# EAGLE board SparkX_EZ_Header-Panel (EAGLE 9.6.2), part 1 of 6
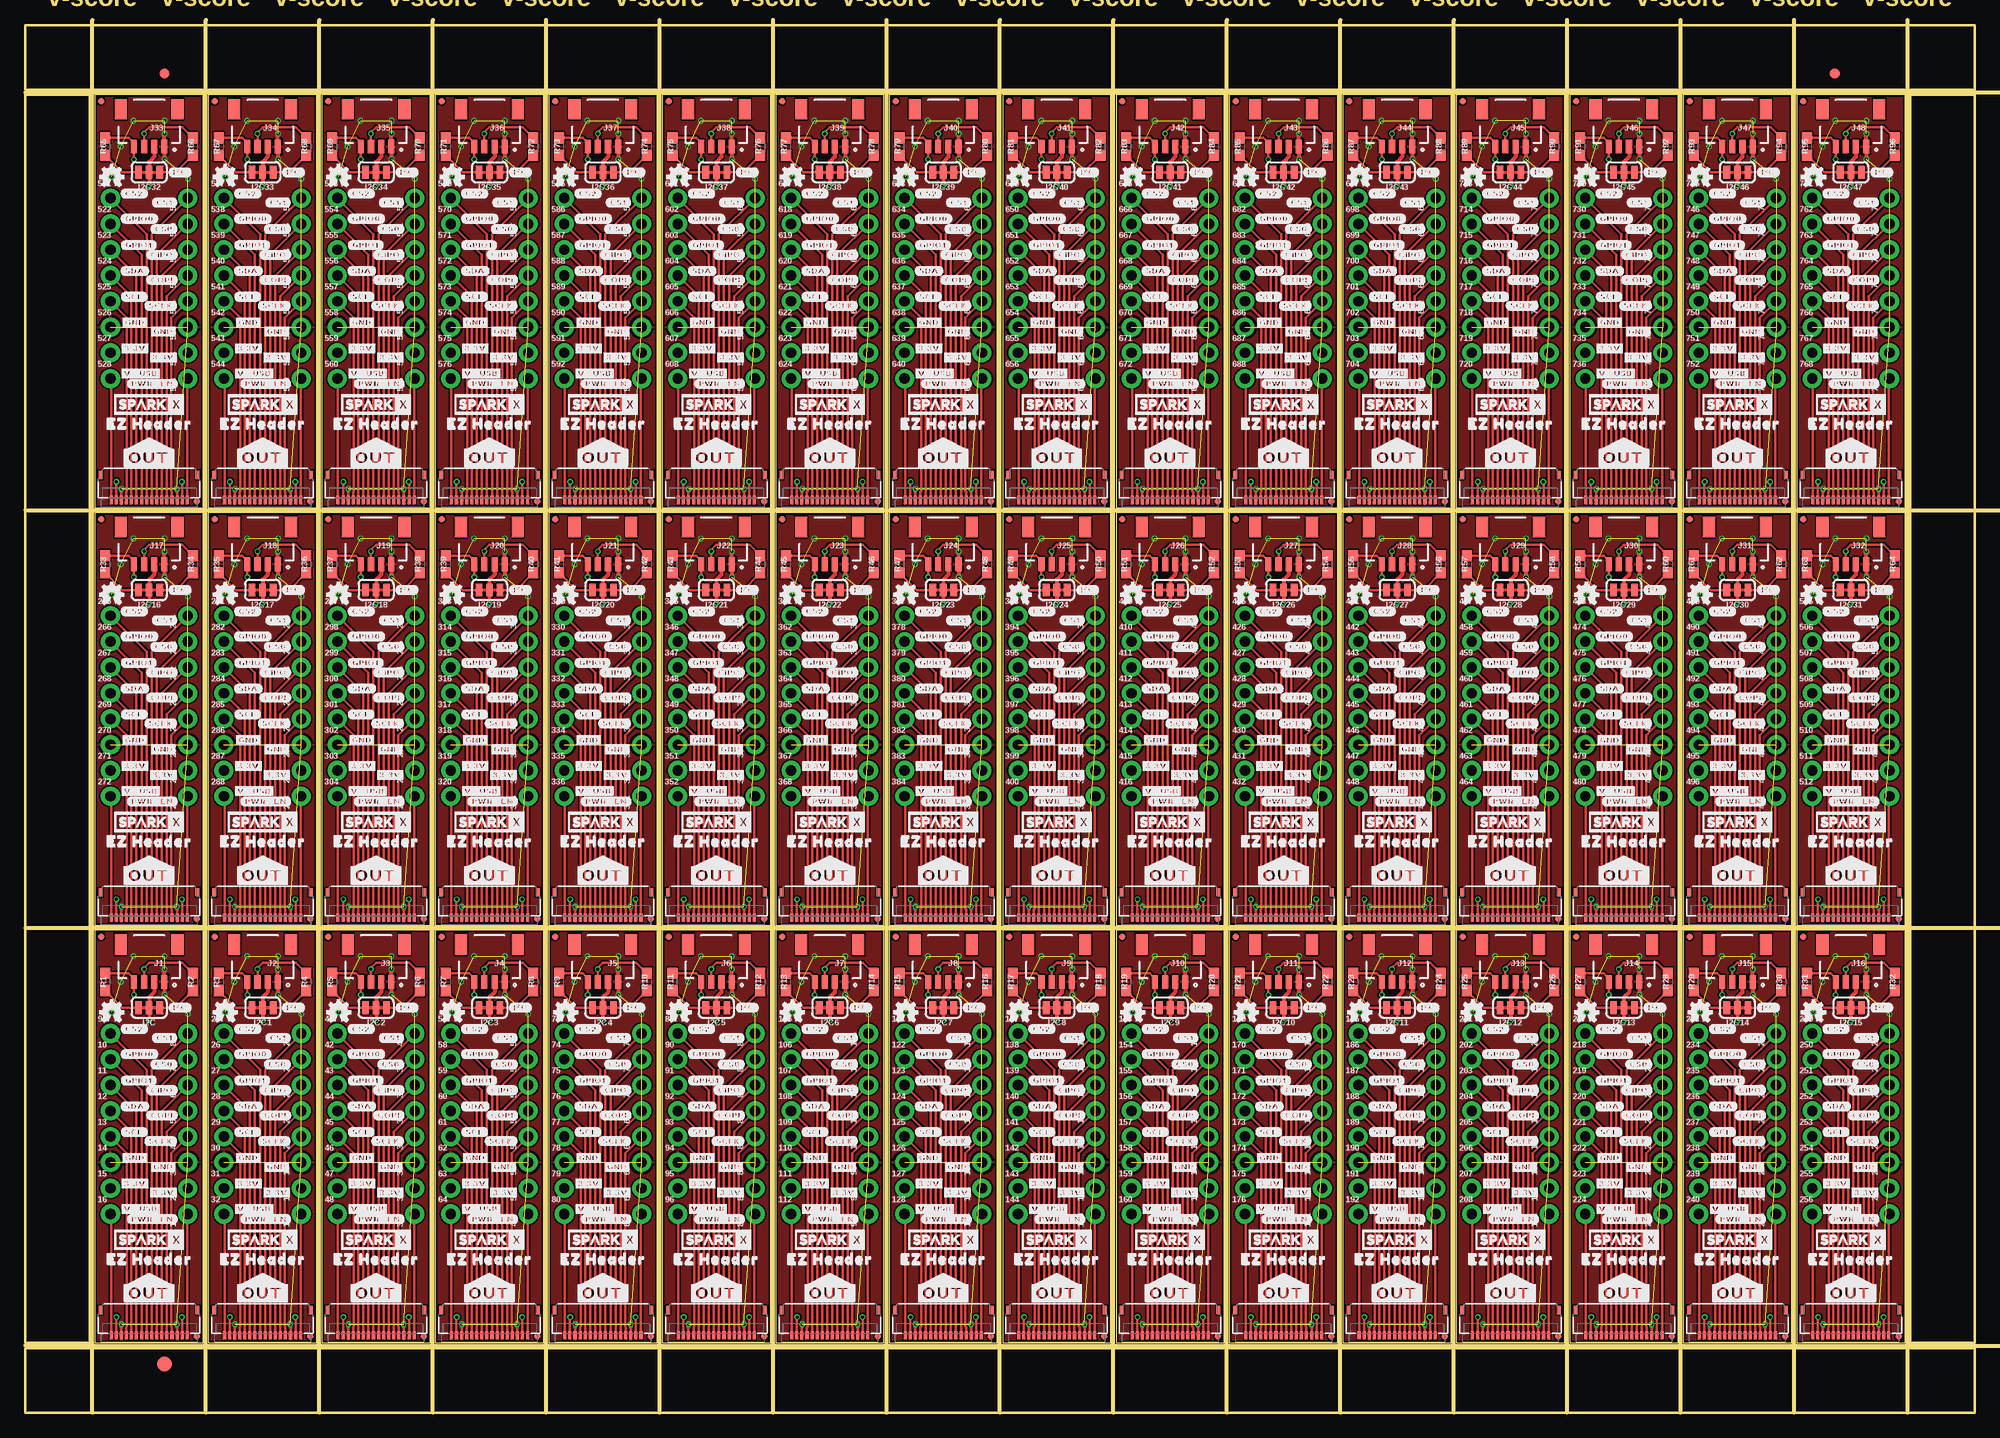
[diagram p0: board, top side]
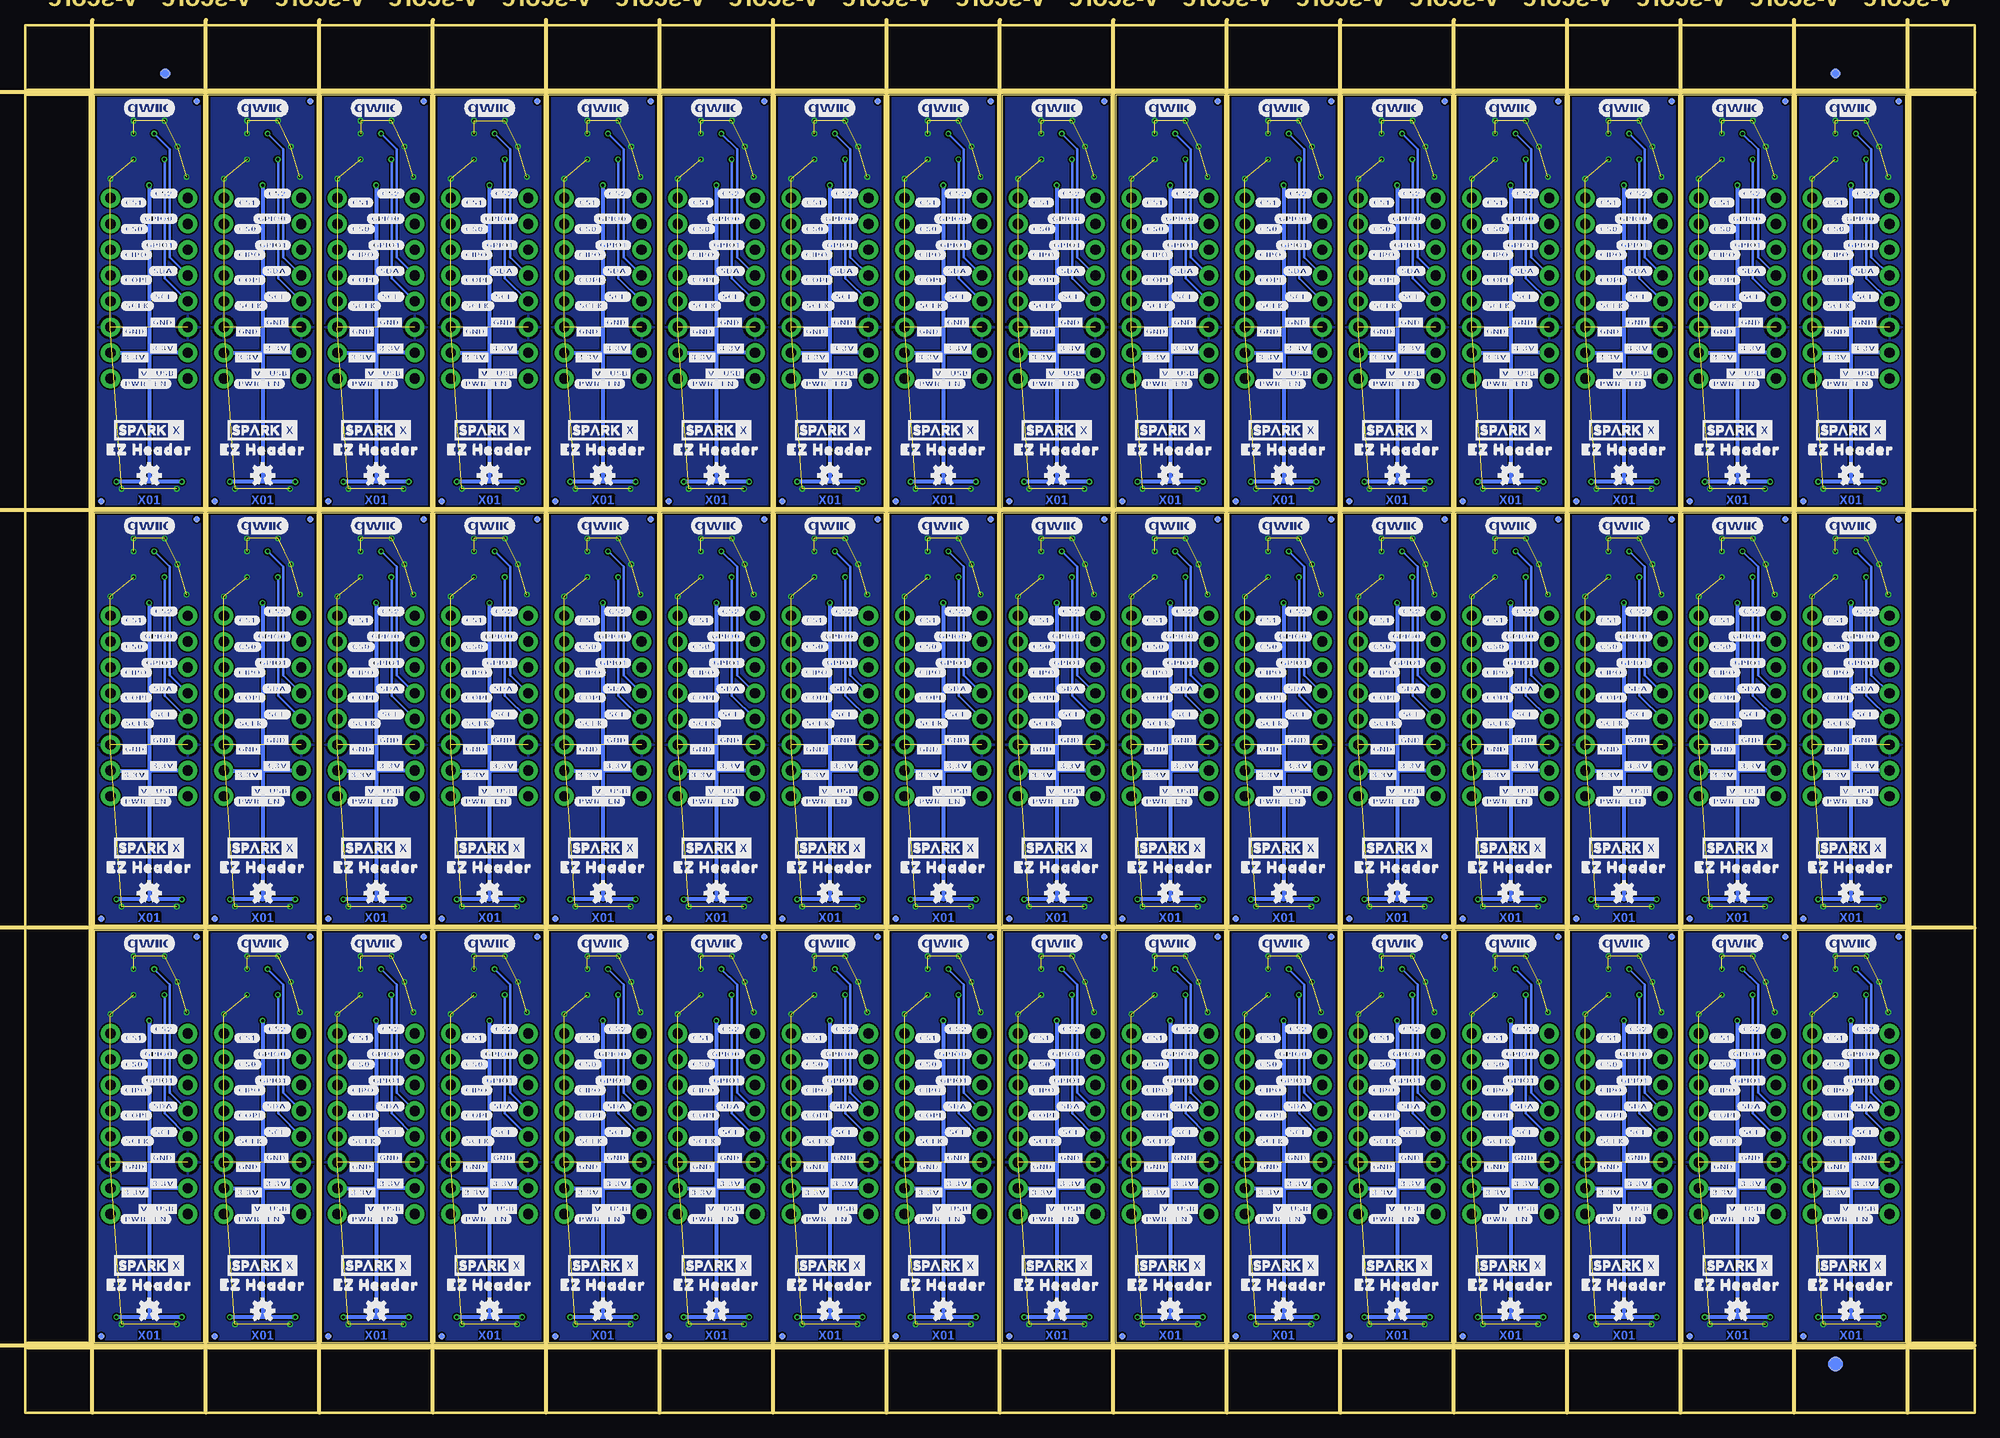
[diagram p1: board, bottom side, seen from below]

Size 192.02 x 136.65 mm. Coordinates in mm from the lower left corner, seen from the top.
Outline: 208 segments
Copper layers (1*16): Top 0.035mm / dielectric 1.5mm / Bottom 0.035mm
Design rules "SparkX_EZ_Header": minimum track width 5mil, minimum drill 0.3mm, track to track 5mil, track to pad 5mil, pad to pad 5mil, via to via 5mil, smd to smd 5mil, copper to edge 7mil, drill to drill 7mil, minimum pad ring 5mil, minimum via ring 5mil, stop-mask expansion 2.5mil, vias tented up to drill 25mil, thermal gap 10mil
Milling: 21 lines

## Footprints (pad centres in the part's own frame; a part is rotated, then mirrored left to right if it is on the bottom)
1X01_NO_SILK = drill 1.016 pad 1.88: 1 0,0
FIDUCIAL-1X2 = smd 1 x 1: 1 0,0
FIDUCIAL-1.5X3 = smd 1.5 x 1.5: 1 0,0
FIDUCIAL-MICRO = smd 0.635 x 0.635: 1 0,0
SMT-JUMPER_3_2-NC_TRACE_SILK = smd 0.66 x 1.27: 1 -1.041,0; 2 0,0; 3 1.041,0
JST04_1MM_RA = smd 0.6 x 1.35: 1 -1.5,0; 2 -0.5,0; 3 0.5,0; 4 1.5,0 | smd 1.2 x 2: NC1 2.8,-3.675; NC2 -2.8,-3.675
FPC_16_DOUBLESIDED_BACKFLIP = smd 0.3 x 0.8: 1 -3.75,1.35; 2 -3.25,1.35; 3 -2.75,1.35; 4 -2.25,1.35; 5 -1.75,1.35; 6 -1.25,1.35; 7 -0.75,1.35; 8 -0.25,1.35; 9 0.25,1.35; 10 0.75,1.35; 11 1.25,1.35; 12 1.75,1.35; 13 2.25,1.35; 14 2.75,1.35; 15 3.25,1.35; 16 3.75,1.35 | smd 0.4 x 0.8: MP1 -4.75,-1.15; MP2 4.75,-1.15
0603 = smd 1.1 x 1: 1 -0.85,0; 2 0.85,0

## Placement (x,y rotation side)
1  [1X01_NO_SILK]  16,19.56 90 top
2  [1X01_NO_SILK]  16,22.1 90 top
3  [1X01_NO_SILK]  16,24.64 90 top
4  [1X01_NO_SILK]  16,27.18 90 top
5  [1X01_NO_SILK]  16,29.72 90 top
6  [1X01_NO_SILK]  16,32.26 90 top
7  [1X01_NO_SILK]  16,34.8 90 top
8  [1X01_NO_SILK]  16,37.34 90 top
9  [1X01_NO_SILK]  8.38,37.34 0 top
10  [1X01_NO_SILK]  8.38,34.8 0 top
11  [1X01_NO_SILK]  8.38,32.26 0 top
12  [1X01_NO_SILK]  8.38,29.72 0 top
13  [1X01_NO_SILK]  8.38,27.18 0 top
14  [1X01_NO_SILK]  8.38,24.64 0 top
15  [1X01_NO_SILK]  8.38,22.1 0 top
16  [1X01_NO_SILK]  8.38,19.56 0 top
17  [1X01_NO_SILK]  27.18,19.56 90 top
18  [1X01_NO_SILK]  27.18,22.1 90 top
19  [1X01_NO_SILK]  27.18,24.64 90 top
20  [1X01_NO_SILK]  27.18,27.18 90 top
21  [1X01_NO_SILK]  27.18,29.72 90 top
22  [1X01_NO_SILK]  27.18,32.26 90 top
23  [1X01_NO_SILK]  27.18,34.8 90 top
24  [1X01_NO_SILK]  27.18,37.34 90 top
25  [1X01_NO_SILK]  19.56,37.34 0 top
26  [1X01_NO_SILK]  19.56,34.8 0 top
27  [1X01_NO_SILK]  19.56,32.26 0 top
28  [1X01_NO_SILK]  19.56,29.72 0 top
29  [1X01_NO_SILK]  19.56,27.18 0 top
30  [1X01_NO_SILK]  19.56,24.64 0 top
31  [1X01_NO_SILK]  19.56,22.1 0 top
32  [1X01_NO_SILK]  19.56,19.56 0 top
33  [1X01_NO_SILK]  38.35,19.56 90 top
34  [1X01_NO_SILK]  38.35,22.1 90 top
35  [1X01_NO_SILK]  38.35,24.64 90 top
36  [1X01_NO_SILK]  38.35,27.18 90 top
37  [1X01_NO_SILK]  38.35,29.72 90 top
38  [1X01_NO_SILK]  38.35,32.26 90 top
39  [1X01_NO_SILK]  38.35,34.8 90 top
40  [1X01_NO_SILK]  38.35,37.34 90 top
41  [1X01_NO_SILK]  30.73,37.34 0 top
42  [1X01_NO_SILK]  30.73,34.8 0 top
43  [1X01_NO_SILK]  30.73,32.26 0 top
44  [1X01_NO_SILK]  30.73,29.72 0 top
45  [1X01_NO_SILK]  30.73,27.18 0 top
46  [1X01_NO_SILK]  30.73,24.64 0 top
47  [1X01_NO_SILK]  30.73,22.1 0 top
48  [1X01_NO_SILK]  30.73,19.56 0 top
49  [1X01_NO_SILK]  49.53,19.56 90 top
50  [1X01_NO_SILK]  49.53,22.1 90 top
51  [1X01_NO_SILK]  49.53,24.64 90 top
52  [1X01_NO_SILK]  49.53,27.18 90 top
53  [1X01_NO_SILK]  49.53,29.72 90 top
54  [1X01_NO_SILK]  49.53,32.26 90 top
55  [1X01_NO_SILK]  49.53,34.8 90 top
56  [1X01_NO_SILK]  49.53,37.34 90 top
57  [1X01_NO_SILK]  41.91,37.34 0 top
58  [1X01_NO_SILK]  41.91,34.8 0 top
59  [1X01_NO_SILK]  41.91,32.26 0 top
60  [1X01_NO_SILK]  41.91,29.72 0 top
61  [1X01_NO_SILK]  41.91,27.18 0 top
62  [1X01_NO_SILK]  41.91,24.64 0 top
63  [1X01_NO_SILK]  41.91,22.1 0 top
64  [1X01_NO_SILK]  41.91,19.56 0 top
65  [1X01_NO_SILK]  60.71,19.56 90 top
66  [1X01_NO_SILK]  60.71,22.1 90 top
67  [1X01_NO_SILK]  60.71,24.64 90 top
68  [1X01_NO_SILK]  60.71,27.18 90 top
69  [1X01_NO_SILK]  60.71,29.72 90 top
70  [1X01_NO_SILK]  60.71,32.26 90 top
71  [1X01_NO_SILK]  60.71,34.8 90 top
72  [1X01_NO_SILK]  60.71,37.34 90 top
73  [1X01_NO_SILK]  53.09,37.34 0 top
74  [1X01_NO_SILK]  53.09,34.8 0 top
75  [1X01_NO_SILK]  53.09,32.26 0 top
76  [1X01_NO_SILK]  53.09,29.72 0 top
77  [1X01_NO_SILK]  53.09,27.18 0 top
78  [1X01_NO_SILK]  53.09,24.64 0 top
79  [1X01_NO_SILK]  53.09,22.1 0 top
80  [1X01_NO_SILK]  53.09,19.56 0 top
81  [1X01_NO_SILK]  71.88,19.56 90 top
82  [1X01_NO_SILK]  71.88,22.1 90 top
83  [1X01_NO_SILK]  71.88,24.64 90 top
84  [1X01_NO_SILK]  71.88,27.18 90 top
85  [1X01_NO_SILK]  71.88,29.72 90 top
86  [1X01_NO_SILK]  71.88,32.26 90 top
87  [1X01_NO_SILK]  71.88,34.8 90 top
88  [1X01_NO_SILK]  71.88,37.34 90 top
89  [1X01_NO_SILK]  64.26,37.34 0 top
90  [1X01_NO_SILK]  64.26,34.8 0 top
91  [1X01_NO_SILK]  64.26,32.26 0 top
92  [1X01_NO_SILK]  64.26,29.72 0 top
93  [1X01_NO_SILK]  64.26,27.18 0 top
94  [1X01_NO_SILK]  64.26,24.64 0 top
95  [1X01_NO_SILK]  64.26,22.1 0 top
96  [1X01_NO_SILK]  64.26,19.56 0 top
97  [1X01_NO_SILK]  83.06,19.56 90 top
98  [1X01_NO_SILK]  83.06,22.1 90 top
99  [1X01_NO_SILK]  83.06,24.64 90 top
100  [1X01_NO_SILK]  83.06,27.18 90 top
101  [1X01_NO_SILK]  83.06,29.72 90 top
102  [1X01_NO_SILK]  83.06,32.26 90 top
103  [1X01_NO_SILK]  83.06,34.8 90 top
104  [1X01_NO_SILK]  83.06,37.34 90 top
105  [1X01_NO_SILK]  75.44,37.34 0 top
106  [1X01_NO_SILK]  75.44,34.8 0 top
107  [1X01_NO_SILK]  75.44,32.26 0 top
108  [1X01_NO_SILK]  75.44,29.72 0 top
109  [1X01_NO_SILK]  75.44,27.18 0 top
110  [1X01_NO_SILK]  75.44,24.64 0 top
111  [1X01_NO_SILK]  75.44,22.1 0 top
112  [1X01_NO_SILK]  75.44,19.56 0 top
113  [1X01_NO_SILK]  94.23,19.56 90 top
114  [1X01_NO_SILK]  94.23,22.1 90 top
115  [1X01_NO_SILK]  94.23,24.64 90 top
116  [1X01_NO_SILK]  94.23,27.18 90 top
117  [1X01_NO_SILK]  94.23,29.72 90 top
118  [1X01_NO_SILK]  94.23,32.26 90 top
119  [1X01_NO_SILK]  94.23,34.8 90 top
120  [1X01_NO_SILK]  94.23,37.34 90 top
121  [1X01_NO_SILK]  86.61,37.34 0 top
122  [1X01_NO_SILK]  86.61,34.8 0 top
123  [1X01_NO_SILK]  86.61,32.26 0 top
124  [1X01_NO_SILK]  86.61,29.72 0 top
125  [1X01_NO_SILK]  86.61,27.18 0 top
126  [1X01_NO_SILK]  86.61,24.64 0 top
127  [1X01_NO_SILK]  86.61,22.1 0 top
128  [1X01_NO_SILK]  86.61,19.56 0 top
129  [1X01_NO_SILK]  105.41,19.56 90 top
130  [1X01_NO_SILK]  105.41,22.1 90 top
131  [1X01_NO_SILK]  105.41,24.64 90 top
132  [1X01_NO_SILK]  105.41,27.18 90 top
133  [1X01_NO_SILK]  105.41,29.72 90 top
134  [1X01_NO_SILK]  105.41,32.26 90 top
135  [1X01_NO_SILK]  105.41,34.8 90 top
136  [1X01_NO_SILK]  105.41,37.34 90 top
137  [1X01_NO_SILK]  97.79,37.34 0 top
138  [1X01_NO_SILK]  97.79,34.8 0 top
139  [1X01_NO_SILK]  97.79,32.26 0 top
140  [1X01_NO_SILK]  97.79,29.72 0 top
141  [1X01_NO_SILK]  97.79,27.18 0 top
142  [1X01_NO_SILK]  97.79,24.64 0 top
143  [1X01_NO_SILK]  97.79,22.1 0 top
144  [1X01_NO_SILK]  97.79,19.56 0 top
145  [1X01_NO_SILK]  116.59,19.56 90 top
146  [1X01_NO_SILK]  116.59,22.1 90 top
147  [1X01_NO_SILK]  116.59,24.64 90 top
148  [1X01_NO_SILK]  116.59,27.18 90 top
149  [1X01_NO_SILK]  116.59,29.72 90 top
150  [1X01_NO_SILK]  116.59,32.26 90 top
151  [1X01_NO_SILK]  116.59,34.8 90 top
152  [1X01_NO_SILK]  116.59,37.34 90 top
153  [1X01_NO_SILK]  108.97,37.34 0 top
154  [1X01_NO_SILK]  108.97,34.8 0 top
155  [1X01_NO_SILK]  108.97,32.26 0 top
156  [1X01_NO_SILK]  108.97,29.72 0 top
157  [1X01_NO_SILK]  108.97,27.18 0 top
158  [1X01_NO_SILK]  108.97,24.64 0 top
159  [1X01_NO_SILK]  108.97,22.1 0 top
160  [1X01_NO_SILK]  108.97,19.56 0 top
161  [1X01_NO_SILK]  127.76,19.56 90 top
162  [1X01_NO_SILK]  127.76,22.1 90 top
163  [1X01_NO_SILK]  127.76,24.64 90 top
164  [1X01_NO_SILK]  127.76,27.18 90 top
165  [1X01_NO_SILK]  127.76,29.72 90 top
166  [1X01_NO_SILK]  127.76,32.26 90 top
167  [1X01_NO_SILK]  127.76,34.8 90 top
168  [1X01_NO_SILK]  127.76,37.34 90 top
169  [1X01_NO_SILK]  120.14,37.34 0 top
170  [1X01_NO_SILK]  120.14,34.8 0 top
171  [1X01_NO_SILK]  120.14,32.26 0 top
172  [1X01_NO_SILK]  120.14,29.72 0 top
173  [1X01_NO_SILK]  120.14,27.18 0 top
174  [1X01_NO_SILK]  120.14,24.64 0 top
175  [1X01_NO_SILK]  120.14,22.1 0 top
176  [1X01_NO_SILK]  120.14,19.56 0 top
177  [1X01_NO_SILK]  138.94,19.56 90 top
178  [1X01_NO_SILK]  138.94,22.1 90 top
179  [1X01_NO_SILK]  138.94,24.64 90 top
180  [1X01_NO_SILK]  138.94,27.18 90 top
181  [1X01_NO_SILK]  138.94,29.72 90 top
182  [1X01_NO_SILK]  138.94,32.26 90 top
183  [1X01_NO_SILK]  138.94,34.8 90 top
184  [1X01_NO_SILK]  138.94,37.34 90 top
185  [1X01_NO_SILK]  131.32,37.34 0 top
186  [1X01_NO_SILK]  131.32,34.8 0 top
187  [1X01_NO_SILK]  131.32,32.26 0 top
188  [1X01_NO_SILK]  131.32,29.72 0 top
189  [1X01_NO_SILK]  131.32,27.18 0 top
190  [1X01_NO_SILK]  131.32,24.64 0 top
191  [1X01_NO_SILK]  131.32,22.1 0 top
192  [1X01_NO_SILK]  131.32,19.56 0 top
193  [1X01_NO_SILK]  150.11,19.56 90 top
194  [1X01_NO_SILK]  150.11,22.1 90 top
195  [1X01_NO_SILK]  150.11,24.64 90 top
196  [1X01_NO_SILK]  150.11,27.18 90 top
197  [1X01_NO_SILK]  150.11,29.72 90 top
198  [1X01_NO_SILK]  150.11,32.26 90 top
199  [1X01_NO_SILK]  150.11,34.8 90 top
200  [1X01_NO_SILK]  150.11,37.34 90 top
201  [1X01_NO_SILK]  142.49,37.34 0 top
202  [1X01_NO_SILK]  142.49,34.8 0 top
203  [1X01_NO_SILK]  142.49,32.26 0 top
204  [1X01_NO_SILK]  142.49,29.72 0 top
205  [1X01_NO_SILK]  142.49,27.18 0 top
206  [1X01_NO_SILK]  142.49,24.64 0 top
207  [1X01_NO_SILK]  142.49,22.1 0 top
208  [1X01_NO_SILK]  142.49,19.56 0 top
209  [1X01_NO_SILK]  161.29,19.56 90 top
210  [1X01_NO_SILK]  161.29,22.1 90 top
211  [1X01_NO_SILK]  161.29,24.64 90 top
212  [1X01_NO_SILK]  161.29,27.18 90 top
213  [1X01_NO_SILK]  161.29,29.72 90 top
214  [1X01_NO_SILK]  161.29,32.26 90 top
215  [1X01_NO_SILK]  161.29,34.8 90 top
216  [1X01_NO_SILK]  161.29,37.34 90 top
217  [1X01_NO_SILK]  153.67,37.34 0 top
218  [1X01_NO_SILK]  153.67,34.8 0 top
219  [1X01_NO_SILK]  153.67,32.26 0 top
220  [1X01_NO_SILK]  153.67,29.72 0 top
221  [1X01_NO_SILK]  153.67,27.18 0 top
222  [1X01_NO_SILK]  153.67,24.64 0 top
223  [1X01_NO_SILK]  153.67,22.1 0 top
224  [1X01_NO_SILK]  153.67,19.56 0 top
225  [1X01_NO_SILK]  172.47,19.56 90 top
226  [1X01_NO_SILK]  172.47,22.1 90 top
227  [1X01_NO_SILK]  172.47,24.64 90 top
228  [1X01_NO_SILK]  172.47,27.18 90 top
229  [1X01_NO_SILK]  172.47,29.72 90 top
230  [1X01_NO_SILK]  172.47,32.26 90 top
231  [1X01_NO_SILK]  172.47,34.8 90 top
232  [1X01_NO_SILK]  172.47,37.34 90 top
233  [1X01_NO_SILK]  164.85,37.34 0 top
234  [1X01_NO_SILK]  164.85,34.8 0 top
235  [1X01_NO_SILK]  164.85,32.26 0 top
236  [1X01_NO_SILK]  164.85,29.72 0 top
237  [1X01_NO_SILK]  164.85,27.18 0 top
238  [1X01_NO_SILK]  164.85,24.64 0 top
239  [1X01_NO_SILK]  164.85,22.1 0 top
240  [1X01_NO_SILK]  164.85,19.56 0 top
241  [1X01_NO_SILK]  183.64,19.56 90 top
242  [1X01_NO_SILK]  183.64,22.1 90 top
243  [1X01_NO_SILK]  183.64,24.64 90 top
244  [1X01_NO_SILK]  183.64,27.18 90 top
245  [1X01_NO_SILK]  183.64,29.72 90 top
246  [1X01_NO_SILK]  183.64,32.26 90 top
247  [1X01_NO_SILK]  183.64,34.8 90 top
248  [1X01_NO_SILK]  183.64,37.34 90 top
249  [1X01_NO_SILK]  176.02,37.34 0 top
250  [1X01_NO_SILK]  176.02,34.8 0 top
251  [1X01_NO_SILK]  176.02,32.26 0 top
252  [1X01_NO_SILK]  176.02,29.72 0 top
253  [1X01_NO_SILK]  176.02,27.18 0 top
254  [1X01_NO_SILK]  176.02,24.64 0 top
255  [1X01_NO_SILK]  176.02,22.1 0 top
256  [1X01_NO_SILK]  176.02,19.56 0 top
257  [1X01_NO_SILK]  16,60.71 90 top
258  [1X01_NO_SILK]  16,63.25 90 top
259  [1X01_NO_SILK]  16,65.79 90 top
260  [1X01_NO_SILK]  16,68.33 90 top
261  [1X01_NO_SILK]  16,70.87 90 top
262  [1X01_NO_SILK]  16,73.41 90 top
263  [1X01_NO_SILK]  16,75.95 90 top
264  [1X01_NO_SILK]  16,78.49 90 top
265  [1X01_NO_SILK]  8.38,78.49 0 top
266  [1X01_NO_SILK]  8.38,75.95 0 top
267  [1X01_NO_SILK]  8.38,73.41 0 top
268  [1X01_NO_SILK]  8.38,70.87 0 top
269  [1X01_NO_SILK]  8.38,68.33 0 top
270  [1X01_NO_SILK]  8.38,65.79 0 top
271  [1X01_NO_SILK]  8.38,63.25 0 top
272  [1X01_NO_SILK]  8.38,60.71 0 top
273  [1X01_NO_SILK]  27.18,60.71 90 top
274  [1X01_NO_SILK]  27.18,63.25 90 top
275  [1X01_NO_SILK]  27.18,65.79 90 top
276  [1X01_NO_SILK]  27.18,68.33 90 top
277  [1X01_NO_SILK]  27.18,70.87 90 top
278  [1X01_NO_SILK]  27.18,73.41 90 top
279  [1X01_NO_SILK]  27.18,75.95 90 top
280  [1X01_NO_SILK]  27.18,78.49 90 top
281  [1X01_NO_SILK]  19.56,78.49 0 top
282  [1X01_NO_SILK]  19.56,75.95 0 top
283  [1X01_NO_SILK]  19.56,73.41 0 top
284  [1X01_NO_SILK]  19.56,70.87 0 top
285  [1X01_NO_SILK]  19.56,68.33 0 top
286  [1X01_NO_SILK]  19.56,65.79 0 top
287  [1X01_NO_SILK]  19.56,63.25 0 top
288  [1X01_NO_SILK]  19.56,60.71 0 top
289  [1X01_NO_SILK]  38.35,60.71 90 top
290  [1X01_NO_SILK]  38.35,63.25 90 top
291  [1X01_NO_SILK]  38.35,65.79 90 top
292  [1X01_NO_SILK]  38.35,68.33 90 top
293  [1X01_NO_SILK]  38.35,70.87 90 top
294  [1X01_NO_SILK]  38.35,73.41 90 top
295  [1X01_NO_SILK]  38.35,75.95 90 top
296  [1X01_NO_SILK]  38.35,78.49 90 top
297  [1X01_NO_SILK]  30.73,78.49 0 top
298  [1X01_NO_SILK]  30.73,75.95 0 top
299  [1X01_NO_SILK]  30.73,73.41 0 top
300  [1X01_NO_SILK]  30.73,70.87 0 top
301  [1X01_NO_SILK]  30.73,68.33 0 top
302  [1X01_NO_SILK]  30.73,65.79 0 top
303  [1X01_NO_SILK]  30.73,63.25 0 top
304  [1X01_NO_SILK]  30.73,60.71 0 top
305  [1X01_NO_SILK]  49.53,60.71 90 top
306  [1X01_NO_SILK]  49.53,63.25 90 top
307  [1X01_NO_SILK]  49.53,65.79 90 top
308  [1X01_NO_SILK]  49.53,68.33 90 top
309  [1X01_NO_SILK]  49.53,70.87 90 top
310  [1X01_NO_SILK]  49.53,73.41 90 top
311  [1X01_NO_SILK]  49.53,75.95 90 top
312  [1X01_NO_SILK]  49.53,78.49 90 top
313  [1X01_NO_SILK]  41.91,78.49 0 top
314  [1X01_NO_SILK]  41.91,75.95 0 top
315  [1X01_NO_SILK]  41.91,73.41 0 top
316  [1X01_NO_SILK]  41.91,70.87 0 top
317  [1X01_NO_SILK]  41.91,68.33 0 top
318  [1X01_NO_SILK]  41.91,65.79 0 top
319  [1X01_NO_SILK]  41.91,63.25 0 top
320  [1X01_NO_SILK]  41.91,60.71 0 top
321  [1X01_NO_SILK]  60.71,60.71 90 top
322  [1X01_NO_SILK]  60.71,63.25 90 top
323  [1X01_NO_SILK]  60.71,65.79 90 top
324  [1X01_NO_SILK]  60.71,68.33 90 top
325  [1X01_NO_SILK]  60.71,70.87 90 top
326  [1X01_NO_SILK]  60.71,73.41 90 top
327  [1X01_NO_SILK]  60.71,75.95 90 top
328  [1X01_NO_SILK]  60.71,78.49 90 top
329  [1X01_NO_SILK]  53.09,78.49 0 top
330  [1X01_NO_SILK]  53.09,75.95 0 top
331  [1X01_NO_SILK]  53.09,73.41 0 top
332  [1X01_NO_SILK]  53.09,70.87 0 top
333  [1X01_NO_SILK]  53.09,68.33 0 top
334  [1X01_NO_SILK]  53.09,65.79 0 top
335  [1X01_NO_SILK]  53.09,63.25 0 top
336  [1X01_NO_SILK]  53.09,60.71 0 top
337  [1X01_NO_SILK]  71.88,60.71 90 top
338  [1X01_NO_SILK]  71.88,63.25 90 top
339  [1X01_NO_SILK]  71.88,65.79 90 top
340  [1X01_NO_SILK]  71.88,68.33 90 top
341  [1X01_NO_SILK]  71.88,70.87 90 top
342  [1X01_NO_SILK]  71.88,73.41 90 top
343  [1X01_NO_SILK]  71.88,75.95 90 top
344  [1X01_NO_SILK]  71.88,78.49 90 top
345  [1X01_NO_SILK]  64.26,78.49 0 top
346  [1X01_NO_SILK]  64.26,75.95 0 top
347  [1X01_NO_SILK]  64.26,73.41 0 top
348  [1X01_NO_SILK]  64.26,70.87 0 top
349  [1X01_NO_SILK]  64.26,68.33 0 top
350  [1X01_NO_SILK]  64.26,65.79 0 top
351  [1X01_NO_SILK]  64.26,63.25 0 top
352  [1X01_NO_SILK]  64.26,60.71 0 top
353  [1X01_NO_SILK]  83.06,60.71 90 top
354  [1X01_NO_SILK]  83.06,63.25 90 top
355  [1X01_NO_SILK]  83.06,65.79 90 top
356  [1X01_NO_SILK]  83.06,68.33 90 top
357  [1X01_NO_SILK]  83.06,70.87 90 top
358  [1X01_NO_SILK]  83.06,73.41 90 top
359  [1X01_NO_SILK]  83.06,75.95 90 top
360  [1X01_NO_SILK]  83.06,78.49 90 top
361  [1X01_NO_SILK]  75.44,78.49 0 top
362  [1X01_NO_SILK]  75.44,75.95 0 top
363  [1X01_NO_SILK]  75.44,73.41 0 top
364  [1X01_NO_SILK]  75.44,70.87 0 top
365  [1X01_NO_SILK]  75.44,68.33 0 top
366  [1X01_NO_SILK]  75.44,65.79 0 top
367  [1X01_NO_SILK]  75.44,63.25 0 top
368  [1X01_NO_SILK]  75.44,60.71 0 top
369  [1X01_NO_SILK]  94.23,60.71 90 top
370  [1X01_NO_SILK]  94.23,63.25 90 top
371  [1X01_NO_SILK]  94.23,65.79 90 top
372  [1X01_NO_SILK]  94.23,68.33 90 top
373  [1X01_NO_SILK]  94.23,70.87 90 top
374  [1X01_NO_SILK]  94.23,73.41 90 top
375  [1X01_NO_SILK]  94.23,75.95 90 top
376  [1X01_NO_SILK]  94.23,78.49 90 top
377  [1X01_NO_SILK]  86.61,78.49 0 top
378  [1X01_NO_SILK]  86.61,75.95 0 top
379  [1X01_NO_SILK]  86.61,73.41 0 top
380  [1X01_NO_SILK]  86.61,70.87 0 top
381  [1X01_NO_SILK]  86.61,68.33 0 top
382  [1X01_NO_SILK]  86.61,65.79 0 top
383  [1X01_NO_SILK]  86.61,63.25 0 top
384  [1X01_NO_SILK]  86.61,60.71 0 top
385  [1X01_NO_SILK]  105.41,60.71 90 top
386  [1X01_NO_SILK]  105.41,63.25 90 top
387  [1X01_NO_SILK]  105.41,65.79 90 top
388  [1X01_NO_SILK]  105.41,68.33 90 top
389  [1X01_NO_SILK]  105.41,70.87 90 top
390  [1X01_NO_SILK]  105.41,73.41 90 top
391  [1X01_NO_SILK]  105.41,75.95 90 top
392  [1X01_NO_SILK]  105.41,78.49 90 top
393  [1X01_NO_SILK]  97.79,78.49 0 top
394  [1X01_NO_SILK]  97.79,75.95 0 top
395  [1X01_NO_SILK]  97.79,73.41 0 top
396  [1X01_NO_SILK]  97.79,70.87 0 top
397  [1X01_NO_SILK]  97.79,68.33 0 top
398  [1X01_NO_SILK]  97.79,65.79 0 top
399  [1X01_NO_SILK]  97.79,63.25 0 top
400  [1X01_NO_SILK]  97.79,60.71 0 top
401  [1X01_NO_SILK]  116.59,60.71 90 top
402  [1X01_NO_SILK]  116.59,63.25 90 top
403  [1X01_NO_SILK]  116.59,65.79 90 top
404  [1X01_NO_SILK]  116.59,68.33 90 top
405  [1X01_NO_SILK]  116.59,70.87 90 top
406  [1X01_NO_SILK]  116.59,73.41 90 top
407  [1X01_NO_SILK]  116.59,75.95 90 top
408  [1X01_NO_SILK]  116.59,78.49 90 top
409  [1X01_NO_SILK]  108.97,78.49 0 top
410  [1X01_NO_SILK]  108.97,75.95 0 top
411  [1X01_NO_SILK]  108.97,73.41 0 top
412  [1X01_NO_SILK]  108.97,70.87 0 top
413  [1X01_NO_SILK]  108.97,68.33 0 top
414  [1X01_NO_SILK]  108.97,65.79 0 top
415  [1X01_NO_SILK]  108.97,63.25 0 top
416  [1X01_NO_SILK]  108.97,60.71 0 top
417  [1X01_NO_SILK]  127.76,60.71 90 top
418  [1X01_NO_SILK]  127.76,63.25 90 top
419  [1X01_NO_SILK]  127.76,65.79 90 top
420  [1X01_NO_SILK]  127.76,68.33 90 top
421  [1X01_NO_SILK]  127.76,70.87 90 top
422  [1X01_NO_SILK]  127.76,73.41 90 top
423  [1X01_NO_SILK]  127.76,75.95 90 top
424  [1X01_NO_SILK]  127.76,78.49 90 top
425  [1X01_NO_SILK]  120.14,78.49 0 top
426  [1X01_NO_SILK]  120.14,75.95 0 top
427  [1X01_NO_SILK]  120.14,73.41 0 top
428  [1X01_NO_SILK]  120.14,70.87 0 top
429  [1X01_NO_SILK]  120.14,68.33 0 top
430  [1X01_NO_SILK]  120.14,65.79 0 top
431  [1X01_NO_SILK]  120.14,63.25 0 top
432  [1X01_NO_SILK]  120.14,60.71 0 top
433  [1X01_NO_SILK]  138.94,60.71 90 top
434  [1X01_NO_SILK]  138.94,63.25 90 top
435  [1X01_NO_SILK]  138.94,65.79 90 top
436  [1X01_NO_SILK]  138.94,68.33 90 top
437  [1X01_NO_SILK]  138.94,70.87 90 top
438  [1X01_NO_SILK]  138.94,73.41 90 top
439  [1X01_NO_SILK]  138.94,75.95 90 top
440  [1X01_NO_SILK]  138.94,78.49 90 top
441  [1X01_NO_SILK]  131.32,78.49 0 top
442  [1X01_NO_SILK]  131.32,75.95 0 top
443  [1X01_NO_SILK]  131.32,73.41 0 top
444  [1X01_NO_SILK]  131.32,70.87 0 top
445  [1X01_NO_SILK]  131.32,68.33 0 top
446  [1X01_NO_SILK]  131.32,65.79 0 top
447  [1X01_NO_SILK]  131.32,63.25 0 top
448  [1X01_NO_SILK]  131.32,60.71 0 top
449  [1X01_NO_SILK]  150.11,60.71 90 top
450  [1X01_NO_SILK]  150.11,63.25 90 top
451  [1X01_NO_SILK]  150.11,65.79 90 top
452  [1X01_NO_SILK]  150.11,68.33 90 top
453  [1X01_NO_SILK]  150.11,70.87 90 top
454  [1X01_NO_SILK]  150.11,73.41 90 top
455  [1X01_NO_SILK]  150.11,75.95 90 top
456  [1X01_NO_SILK]  150.11,78.49 90 top
457  [1X01_NO_SILK]  142.49,78.49 0 top
458  [1X01_NO_SILK]  142.49,75.95 0 top
459  [1X01_NO_SILK]  142.49,73.41 0 top
460  [1X01_NO_SILK]  142.49,70.87 0 top
461  [1X01_NO_SILK]  142.49,68.33 0 top
462  [1X01_NO_SILK]  142.49,65.79 0 top
463  [1X01_NO_SILK]  142.49,63.25 0 top
464  [1X01_NO_SILK]  142.49,60.71 0 top
465  [1X01_NO_SILK]  161.29,60.71 90 top
466  [1X01_NO_SILK]  161.29,63.25 90 top
467  [1X01_NO_SILK]  161.29,65.79 90 top
468  [1X01_NO_SILK]  161.29,68.33 90 top
469  [1X01_NO_SILK]  161.29,70.87 90 top
470  [1X01_NO_SILK]  161.29,73.41 90 top
471  [1X01_NO_SILK]  161.29,75.95 90 top
472  [1X01_NO_SILK]  161.29,78.49 90 top
473  [1X01_NO_SILK]  153.67,78.49 0 top
474  [1X01_NO_SILK]  153.67,75.95 0 top
475  [1X01_NO_SILK]  153.67,73.41 0 top
476  [1X01_NO_SILK]  153.67,70.87 0 top
477  [1X01_NO_SILK]  153.67,68.33 0 top
478  [1X01_NO_SILK]  153.67,65.79 0 top
479  [1X01_NO_SILK]  153.67,63.25 0 top
480  [1X01_NO_SILK]  153.67,60.71 0 top
481  [1X01_NO_SILK]  172.47,60.71 90 top
482  [1X01_NO_SILK]  172.47,63.25 90 top
483  [1X01_NO_SILK]  172.47,65.79 90 top
484  [1X01_NO_SILK]  172.47,68.33 90 top
485  [1X01_NO_SILK]  172.47,70.87 90 top
486  [1X01_NO_SILK]  172.47,73.41 90 top
487  [1X01_NO_SILK]  172.47,75.95 90 top
488  [1X01_NO_SILK]  172.47,78.49 90 top
489  [1X01_NO_SILK]  164.85,78.49 0 top
490  [1X01_NO_SILK]  164.85,75.95 0 top
491  [1X01_NO_SILK]  164.85,73.41 0 top
492  [1X01_NO_SILK]  164.85,70.87 0 top
493  [1X01_NO_SILK]  164.85,68.33 0 top
494  [1X01_NO_SILK]  164.85,65.79 0 top
495  [1X01_NO_SILK]  164.85,63.25 0 top
496  [1X01_NO_SILK]  164.85,60.71 0 top
497  [1X01_NO_SILK]  183.64,60.71 90 top
498  [1X01_NO_SILK]  183.64,63.25 90 top
499  [1X01_NO_SILK]  183.64,65.79 90 top
500  [1X01_NO_SILK]  183.64,68.33 90 top
501  [1X01_NO_SILK]  183.64,70.87 90 top
502  [1X01_NO_SILK]  183.64,73.41 90 top
503  [1X01_NO_SILK]  183.64,75.95 90 top
504  [1X01_NO_SILK]  183.64,78.49 90 top
505  [1X01_NO_SILK]  176.02,78.49 0 top
506  [1X01_NO_SILK]  176.02,75.95 0 top
507  [1X01_NO_SILK]  176.02,73.41 0 top
508  [1X01_NO_SILK]  176.02,70.87 0 top
509  [1X01_NO_SILK]  176.02,68.33 0 top
510  [1X01_NO_SILK]  176.02,65.79 0 top
511  [1X01_NO_SILK]  176.02,63.25 0 top
512  [1X01_NO_SILK]  176.02,60.71 0 top
513  [1X01_NO_SILK]  16,101.85 90 top
514  [1X01_NO_SILK]  16,104.39 90 top
515  [1X01_NO_SILK]  16,106.93 90 top
516  [1X01_NO_SILK]  16,109.47 90 top
517  [1X01_NO_SILK]  16,112.01 90 top
518  [1X01_NO_SILK]  16,114.55 90 top
519  [1X01_NO_SILK]  16,117.09 90 top
520  [1X01_NO_SILK]  16,119.63 90 top
521  [1X01_NO_SILK]  8.38,119.63 0 top
522  [1X01_NO_SILK]  8.38,117.09 0 top
523  [1X01_NO_SILK]  8.38,114.55 0 top
524  [1X01_NO_SILK]  8.38,112.01 0 top
525  [1X01_NO_SILK]  8.38,109.47 0 top
526  [1X01_NO_SILK]  8.38,106.93 0 top
527  [1X01_NO_SILK]  8.38,104.39 0 top
528  [1X01_NO_SILK]  8.38,101.85 0 top
529  [1X01_NO_SILK]  27.18,101.85 90 top
530  [1X01_NO_SILK]  27.18,104.39 90 top
531  [1X01_NO_SILK]  27.18,106.93 90 top
532  [1X01_NO_SILK]  27.18,109.47 90 top
533  [1X01_NO_SILK]  27.18,112.01 90 top
534  [1X01_NO_SILK]  27.18,114.55 90 top
535  [1X01_NO_SILK]  27.18,117.09 90 top
536  [1X01_NO_SILK]  27.18,119.63 90 top
537  [1X01_NO_SILK]  19.56,119.63 0 top
538  [1X01_NO_SILK]  19.56,117.09 0 top
539  [1X01_NO_SILK]  19.56,114.55 0 top
540  [1X01_NO_SILK]  19.56,112.01 0 top
541  [1X01_NO_SILK]  19.56,109.47 0 top
542  [1X01_NO_SILK]  19.56,106.93 0 top
543  [1X01_NO_SILK]  19.56,104.39 0 top
544  [1X01_NO_SILK]  19.56,101.85 0 top
545  [1X01_NO_SILK]  38.35,101.85 90 top
546  [1X01_NO_SILK]  38.35,104.39 90 top
547  [1X01_NO_SILK]  38.35,106.93 90 top
548  [1X01_NO_SILK]  38.35,109.47 90 top
549  [1X01_NO_SILK]  38.35,112.01 90 top
550  [1X01_NO_SILK]  38.35,114.55 90 top
551  [1X01_NO_SILK]  38.35,117.09 90 top
552  [1X01_NO_SILK]  38.35,119.63 90 top
553  [1X01_NO_SILK]  30.73,119.63 0 top
554  [1X01_NO_SILK]  30.73,117.09 0 top
555  [1X01_NO_SILK]  30.73,114.55 0 top
556  [1X01_NO_SILK]  30.73,112.01 0 top
557  [1X01_NO_SILK]  30.73,109.47 0 top
558  [1X01_NO_SILK]  30.73,106.93 0 top
559  [1X01_NO_SILK]  30.73,104.39 0 top
560  [1X01_NO_SILK]  30.73,101.85 0 top
561  [1X01_NO_SILK]  49.53,101.85 90 top
562  [1X01_NO_SILK]  49.53,104.39 90 top
563  [1X01_NO_SILK]  49.53,106.93 90 top
564  [1X01_NO_SILK]  49.53,109.47 90 top
565  [1X01_NO_SILK]  49.53,112.01 90 top
566  [1X01_NO_SILK]  49.53,114.55 90 top
567  [1X01_NO_SILK]  49.53,117.09 90 top
568  [1X01_NO_SILK]  49.53,119.63 90 top
569  [1X01_NO_SILK]  41.91,119.63 0 top
570  [1X01_NO_SILK]  41.91,117.09 0 top
571  [1X01_NO_SILK]  41.91,114.55 0 top
572  [1X01_NO_SILK]  41.91,112.01 0 top
573  [1X01_NO_SILK]  41.91,109.47 0 top
574  [1X01_NO_SILK]  41.91,106.93 0 top
575  [1X01_NO_SILK]  41.91,104.39 0 top
576  [1X01_NO_SILK]  41.91,101.85 0 top
577  [1X01_NO_SILK]  60.71,101.85 90 top
578  [1X01_NO_SILK]  60.71,104.39 90 top
579  [1X01_NO_SILK]  60.71,106.93 90 top
580  [1X01_NO_SILK]  60.71,109.47 90 top
581  [1X01_NO_SILK]  60.71,112.01 90 top
582  [1X01_NO_SILK]  60.71,114.55 90 top
583  [1X01_NO_SILK]  60.71,117.09 90 top
584  [1X01_NO_SILK]  60.71,119.63 90 top
585  [1X01_NO_SILK]  53.09,119.63 0 top
586  [1X01_NO_SILK]  53.09,117.09 0 top
587  [1X01_NO_SILK]  53.09,114.55 0 top
588  [1X01_NO_SILK]  53.09,112.01 0 top
589  [1X01_NO_SILK]  53.09,109.47 0 top
590  [1X01_NO_SILK]  53.09,106.93 0 top
591  [1X01_NO_SILK]  53.09,104.39 0 top
592  [1X01_NO_SILK]  53.09,101.85 0 top
593  [1X01_NO_SILK]  71.88,101.85 90 top
594  [1X01_NO_SILK]  71.88,104.39 90 top
595  [1X01_NO_SILK]  71.88,106.93 90 top
596  [1X01_NO_SILK]  71.88,109.47 90 top
597  [1X01_NO_SILK]  71.88,112.01 90 top
598  [1X01_NO_SILK]  71.88,114.55 90 top
599  [1X01_NO_SILK]  71.88,117.09 90 top
600  [1X01_NO_SILK]  71.88,119.63 90 top
601  [1X01_NO_SILK]  64.26,119.63 0 top
602  [1X01_NO_SILK]  64.26,117.09 0 top
603  [1X01_NO_SILK]  64.26,114.55 0 top
604  [1X01_NO_SILK]  64.26,112.01 0 top
605  [1X01_NO_SILK]  64.26,109.47 0 top
606  [1X01_NO_SILK]  64.26,106.93 0 top
607  [1X01_NO_SILK]  64.26,104.39 0 top
608  [1X01_NO_SILK]  64.26,101.85 0 top
609  [1X01_NO_SILK]  83.06,101.85 90 top
610  [1X01_NO_SILK]  83.06,104.39 90 top
611  [1X01_NO_SILK]  83.06,106.93 90 top
612  [1X01_NO_SILK]  83.06,109.47 90 top
613  [1X01_NO_SILK]  83.06,112.01 90 top
614  [1X01_NO_SILK]  83.06,114.55 90 top
615  [1X01_NO_SILK]  83.06,117.09 90 top
616  [1X01_NO_SILK]  83.06,119.63 90 top
617  [1X01_NO_SILK]  75.44,119.63 0 top
618  [1X01_NO_SILK]  75.44,117.09 0 top
619  [1X01_NO_SILK]  75.44,114.55 0 top
620  [1X01_NO_SILK]  75.44,112.01 0 top
621  [1X01_NO_SILK]  75.44,109.47 0 top
622  [1X01_NO_SILK]  75.44,106.93 0 top
623  [1X01_NO_SILK]  75.44,104.39 0 top
624  [1X01_NO_SILK]  75.44,101.85 0 top
625  [1X01_NO_SILK]  94.23,101.85 90 top
626  [1X01_NO_SILK]  94.23,104.39 90 top
627  [1X01_NO_SILK]  94.23,106.93 90 top
628  [1X01_NO_SILK]  94.23,109.47 90 top
629  [1X01_NO_SILK]  94.23,112.01 90 top
630  [1X01_NO_SILK]  94.23,114.55 90 top
631  [1X01_NO_SILK]  94.23,117.09 90 top
632  [1X01_NO_SILK]  94.23,119.63 90 top
633  [1X01_NO_SILK]  86.61,119.63 0 top
634  [1X01_NO_SILK]  86.61,117.09 0 top
635  [1X01_NO_SILK]  86.61,114.55 0 top
636  [1X01_NO_SILK]  86.61,112.01 0 top
637  [1X01_NO_SILK]  86.61,109.47 0 top
638  [1X01_NO_SILK]  86.61,106.93 0 top
639  [1X01_NO_SILK]  86.61,104.39 0 top
640  [1X01_NO_SILK]  86.61,101.85 0 top
641  [1X01_NO_SILK]  105.41,101.85 90 top
642  [1X01_NO_SILK]  105.41,104.39 90 top
643  [1X01_NO_SILK]  105.41,106.93 90 top
644  [1X01_NO_SILK]  105.41,109.47 90 top
645  [1X01_NO_SILK]  105.41,112.01 90 top
646  [1X01_NO_SILK]  105.41,114.55 90 top
647  [1X01_NO_SILK]  105.41,117.09 90 top
648  [1X01_NO_SILK]  105.41,119.63 90 top
649  [1X01_NO_SILK]  97.79,119.63 0 top
650  [1X01_NO_SILK]  97.79,117.09 0 top
651  [1X01_NO_SILK]  97.79,114.55 0 top
652  [1X01_NO_SILK]  97.79,112.01 0 top
653  [1X01_NO_SILK]  97.79,109.47 0 top
654  [1X01_NO_SILK]  97.79,106.93 0 top
655  [1X01_NO_SILK]  97.79,104.39 0 top
656  [1X01_NO_SILK]  97.79,101.85 0 top
657  [1X01_NO_SILK]  116.59,101.85 90 top
658  [1X01_NO_SILK]  116.59,104.39 90 top
659  [1X01_NO_SILK]  116.59,106.93 90 top
660  [1X01_NO_SILK]  116.59,109.47 90 top
661  [1X01_NO_SILK]  116.59,112.01 90 top
662  [1X01_NO_SILK]  116.59,114.55 90 top
663  [1X01_NO_SILK]  116.59,117.09 90 top
664  [1X01_NO_SILK]  116.59,119.63 90 top
665  [1X01_NO_SILK]  108.97,119.63 0 top
666  [1X01_NO_SILK]  108.97,117.09 0 top
667  [1X01_NO_SILK]  108.97,114.55 0 top
668  [1X01_NO_SILK]  108.97,112.01 0 top
669  [1X01_NO_SILK]  108.97,109.47 0 top
670  [1X01_NO_SILK]  108.97,106.93 0 top
671  [1X01_NO_SILK]  108.97,104.39 0 top
672  [1X01_NO_SILK]  108.97,101.85 0 top
673  [1X01_NO_SILK]  127.76,101.85 90 top
674  [1X01_NO_SILK]  127.76,104.39 90 top
675  [1X01_NO_SILK]  127.76,106.93 90 top
676  [1X01_NO_SILK]  127.76,109.47 90 top
677  [1X01_NO_SILK]  127.76,112.01 90 top
678  [1X01_NO_SILK]  127.76,114.55 90 top
679  [1X01_NO_SILK]  127.76,117.09 90 top
680  [1X01_NO_SILK]  127.76,119.63 90 top
681  [1X01_NO_SILK]  120.14,119.63 0 top
682  [1X01_NO_SILK]  120.14,117.09 0 top
683  [1X01_NO_SILK]  120.14,114.55 0 top
684  [1X01_NO_SILK]  120.14,112.01 0 top
685  [1X01_NO_SILK]  120.14,109.47 0 top
686  [1X01_NO_SILK]  120.14,106.93 0 top
687  [1X01_NO_SILK]  120.14,104.39 0 top
688  [1X01_NO_SILK]  120.14,101.85 0 top
689  [1X01_NO_SILK]  138.94,101.85 90 top
690  [1X01_NO_SILK]  138.94,104.39 90 top
691  [1X01_NO_SILK]  138.94,106.93 90 top
692  [1X01_NO_SILK]  138.94,109.47 90 top
693  [1X01_NO_SILK]  138.94,112.01 90 top
694  [1X01_NO_SILK]  138.94,114.55 90 top
695  [1X01_NO_SILK]  138.94,117.09 90 top
696  [1X01_NO_SILK]  138.94,119.63 90 top
697  [1X01_NO_SILK]  131.32,119.63 0 top
698  [1X01_NO_SILK]  131.32,117.09 0 top
699  [1X01_NO_SILK]  131.32,114.55 0 top
700  [1X01_NO_SILK]  131.32,112.01 0 top
701  [1X01_NO_SILK]  131.32,109.47 0 top
702  [1X01_NO_SILK]  131.32,106.93 0 top
703  [1X01_NO_SILK]  131.32,104.39 0 top
704  [1X01_NO_SILK]  131.32,101.85 0 top
705  [1X01_NO_SILK]  150.11,101.85 90 top
706  [1X01_NO_SILK]  150.11,104.39 90 top
707  [1X01_NO_SILK]  150.11,106.93 90 top
708  [1X01_NO_SILK]  150.11,109.47 90 top
709  [1X01_NO_SILK]  150.11,112.01 90 top
710  [1X01_NO_SILK]  150.11,114.55 90 top
711  [1X01_NO_SILK]  150.11,117.09 90 top
712  [1X01_NO_SILK]  150.11,119.63 90 top
713  [1X01_NO_SILK]  142.49,119.63 0 top
714  [1X01_NO_SILK]  142.49,117.09 0 top
715  [1X01_NO_SILK]  142.49,114.55 0 top
716  [1X01_NO_SILK]  142.49,112.01 0 top
717  [1X01_NO_SILK]  142.49,109.47 0 top
718  [1X01_NO_SILK]  142.49,106.93 0 top
719  [1X01_NO_SILK]  142.49,104.39 0 top
720  [1X01_NO_SILK]  142.49,101.85 0 top
721  [1X01_NO_SILK]  161.29,101.85 90 top
722  [1X01_NO_SILK]  161.29,104.39 90 top
723  [1X01_NO_SILK]  161.29,106.93 90 top
724  [1X01_NO_SILK]  161.29,109.47 90 top
725  [1X01_NO_SILK]  161.29,112.01 90 top
726  [1X01_NO_SILK]  161.29,114.55 90 top
727  [1X01_NO_SILK]  161.29,117.09 90 top
728  [1X01_NO_SILK]  161.29,119.63 90 top
729  [1X01_NO_SILK]  153.67,119.63 0 top
730  [1X01_NO_SILK]  153.67,117.09 0 top
731  [1X01_NO_SILK]  153.67,114.55 0 top
732  [1X01_NO_SILK]  153.67,112.01 0 top
733  [1X01_NO_SILK]  153.67,109.47 0 top
734  [1X01_NO_SILK]  153.67,106.93 0 top
735  [1X01_NO_SILK]  153.67,104.39 0 top
736  [1X01_NO_SILK]  153.67,101.85 0 top
737  [1X01_NO_SILK]  172.47,101.85 90 top
738  [1X01_NO_SILK]  172.47,104.39 90 top
739  [1X01_NO_SILK]  172.47,106.93 90 top
740  [1X01_NO_SILK]  172.47,109.47 90 top
741  [1X01_NO_SILK]  172.47,112.01 90 top
742  [1X01_NO_SILK]  172.47,114.55 90 top
743  [1X01_NO_SILK]  172.47,117.09 90 top
744  [1X01_NO_SILK]  172.47,119.63 90 top
745  [1X01_NO_SILK]  164.85,119.63 0 top
746  [1X01_NO_SILK]  164.85,117.09 0 top
747  [1X01_NO_SILK]  164.85,114.55 0 top
748  [1X01_NO_SILK]  164.85,112.01 0 top
749  [1X01_NO_SILK]  164.85,109.47 0 top
750  [1X01_NO_SILK]  164.85,106.93 0 top
751  [1X01_NO_SILK]  164.85,104.39 0 top
752  [1X01_NO_SILK]  164.85,101.85 0 top
753  [1X01_NO_SILK]  183.64,101.85 90 top
754  [1X01_NO_SILK]  183.64,104.39 90 top
755  [1X01_NO_SILK]  183.64,106.93 90 top
756  [1X01_NO_SILK]  183.64,109.47 90 top
757  [1X01_NO_SILK]  183.64,112.01 90 top
758  [1X01_NO_SILK]  183.64,114.55 90 top
759  [1X01_NO_SILK]  183.64,117.09 90 top
760  [1X01_NO_SILK]  183.64,119.63 90 top
761  [1X01_NO_SILK]  176.02,119.63 0 top
762  [1X01_NO_SILK]  176.02,117.09 0 top
763  [1X01_NO_SILK]  176.02,114.55 0 top
764  [1X01_NO_SILK]  176.02,112.01 0 top
765  [1X01_NO_SILK]  176.02,109.47 0 top
766  [1X01_NO_SILK]  176.02,106.93 0 top
767  [1X01_NO_SILK]  176.02,104.39 0 top
768  [1X01_NO_SILK]  176.02,101.85 0 top
E$1  [FIDUCIAL-1X2]  13.72,131.89 0 top
E$2  [FIDUCIAL-1X2]  13.72,131.89 0 bottom
E$3  [FIDUCIAL-1X2]  178.24,131.89 0 top
E$4  [FIDUCIAL-1X2]  178.24,131.89 0 bottom
E$5  [FIDUCIAL-1.5X3]  13.72,4.76 0 top
E$6  [FIDUCIAL-1.5X3]  13.72,4.76 0 bottom
FD1  FIDUCIALUFIDUCIAL  [FIDUCIAL-MICRO]  7.49,46.86 0 top
FD2  FIDUCIALUFIDUCIAL  [FIDUCIAL-MICRO]  7.49,46.86 0 bottom
FD3  FIDUCIALUFIDUCIAL  [FIDUCIAL-MICRO]  16.89,7.49 0 top
FD4  FIDUCIALUFIDUCIAL  [FIDUCIAL-MICRO]  16.89,7.49 0 bottom
FD5  FIDUCIALUFIDUCIAL  [FIDUCIAL-MICRO]  18.67,46.86 0 top
FD6  FIDUCIALUFIDUCIAL  [FIDUCIAL-MICRO]  18.67,46.86 0 bottom
FD7  FIDUCIALUFIDUCIAL  [FIDUCIAL-MICRO]  28.07,7.49 0 top
FD8  FIDUCIALUFIDUCIAL  [FIDUCIAL-MICRO]  28.07,7.49 0 bottom
FD9  FIDUCIALUFIDUCIAL  [FIDUCIAL-MICRO]  29.84,46.86 0 top
FD10  FIDUCIALUFIDUCIAL  [FIDUCIAL-MICRO]  29.84,46.86 0 bottom
FD11  FIDUCIALUFIDUCIAL  [FIDUCIAL-MICRO]  39.24,7.49 0 top
FD12  FIDUCIALUFIDUCIAL  [FIDUCIAL-MICRO]  39.24,7.49 0 bottom
FD13  FIDUCIALUFIDUCIAL  [FIDUCIAL-MICRO]  41.02,46.86 0 top
FD14  FIDUCIALUFIDUCIAL  [FIDUCIAL-MICRO]  41.02,46.86 0 bottom
FD15  FIDUCIALUFIDUCIAL  [FIDUCIAL-MICRO]  50.42,7.49 0 top
FD16  FIDUCIALUFIDUCIAL  [FIDUCIAL-MICRO]  50.42,7.49 0 bottom
FD17  FIDUCIALUFIDUCIAL  [FIDUCIAL-MICRO]  52.2,46.86 0 top
FD18  FIDUCIALUFIDUCIAL  [FIDUCIAL-MICRO]  52.2,46.86 0 bottom
FD19  FIDUCIALUFIDUCIAL  [FIDUCIAL-MICRO]  61.59,7.49 0 top
FD20  FIDUCIALUFIDUCIAL  [FIDUCIAL-MICRO]  61.59,7.49 0 bottom
FD21  FIDUCIALUFIDUCIAL  [FIDUCIAL-MICRO]  63.37,46.86 0 top
FD22  FIDUCIALUFIDUCIAL  [FIDUCIAL-MICRO]  63.37,46.86 0 bottom
FD23  FIDUCIALUFIDUCIAL  [FIDUCIAL-MICRO]  72.77,7.49 0 top
FD24  FIDUCIALUFIDUCIAL  [FIDUCIAL-MICRO]  72.77,7.49 0 bottom
FD25  FIDUCIALUFIDUCIAL  [FIDUCIAL-MICRO]  74.55,46.86 0 top
FD26  FIDUCIALUFIDUCIAL  [FIDUCIAL-MICRO]  74.55,46.86 0 bottom
FD27  FIDUCIALUFIDUCIAL  [FIDUCIAL-MICRO]  83.95,7.49 0 top
FD28  FIDUCIALUFIDUCIAL  [FIDUCIAL-MICRO]  83.95,7.49 0 bottom
FD29  FIDUCIALUFIDUCIAL  [FIDUCIAL-MICRO]  85.73,46.86 0 top
FD30  FIDUCIALUFIDUCIAL  [FIDUCIAL-MICRO]  85.73,46.86 0 bottom
FD31  FIDUCIALUFIDUCIAL  [FIDUCIAL-MICRO]  95.12,7.49 0 top
FD32  FIDUCIALUFIDUCIAL  [FIDUCIAL-MICRO]  95.12,7.49 0 bottom
FD33  FIDUCIALUFIDUCIAL  [FIDUCIAL-MICRO]  96.9,46.86 0 top
FD34  FIDUCIALUFIDUCIAL  [FIDUCIAL-MICRO]  96.9,46.86 0 bottom
FD35  FIDUCIALUFIDUCIAL  [FIDUCIAL-MICRO]  106.3,7.49 0 top
FD36  FIDUCIALUFIDUCIAL  [FIDUCIAL-MICRO]  106.3,7.49 0 bottom
FD37  FIDUCIALUFIDUCIAL  [FIDUCIAL-MICRO]  108.08,46.86 0 top
FD38  FIDUCIALUFIDUCIAL  [FIDUCIAL-MICRO]  108.08,46.86 0 bottom
FD39  FIDUCIALUFIDUCIAL  [FIDUCIAL-MICRO]  117.48,7.49 0 top
FD40  FIDUCIALUFIDUCIAL  [FIDUCIAL-MICRO]  117.48,7.49 0 bottom
FD41  FIDUCIALUFIDUCIAL  [FIDUCIAL-MICRO]  119.25,46.86 0 top
FD42  FIDUCIALUFIDUCIAL  [FIDUCIAL-MICRO]  119.25,46.86 0 bottom
FD43  FIDUCIALUFIDUCIAL  [FIDUCIAL-MICRO]  128.65,7.49 0 top
FD44  FIDUCIALUFIDUCIAL  [FIDUCIAL-MICRO]  128.65,7.49 0 bottom
FD45  FIDUCIALUFIDUCIAL  [FIDUCIAL-MICRO]  130.43,46.86 0 top
FD46  FIDUCIALUFIDUCIAL  [FIDUCIAL-MICRO]  130.43,46.86 0 bottom
FD47  FIDUCIALUFIDUCIAL  [FIDUCIAL-MICRO]  139.83,7.49 0 top
FD48  FIDUCIALUFIDUCIAL  [FIDUCIAL-MICRO]  139.83,7.49 0 bottom
FD49  FIDUCIALUFIDUCIAL  [FIDUCIAL-MICRO]  141.61,46.86 0 top
FD50  FIDUCIALUFIDUCIAL  [FIDUCIAL-MICRO]  141.61,46.86 0 bottom
FD51  FIDUCIALUFIDUCIAL  [FIDUCIAL-MICRO]  151,7.49 0 top
FD52  FIDUCIALUFIDUCIAL  [FIDUCIAL-MICRO]  151,7.49 0 bottom
FD53  FIDUCIALUFIDUCIAL  [FIDUCIAL-MICRO]  152.78,46.86 0 top
FD54  FIDUCIALUFIDUCIAL  [FIDUCIAL-MICRO]  152.78,46.86 0 bottom
FD55  FIDUCIALUFIDUCIAL  [FIDUCIAL-MICRO]  162.18,7.49 0 top
FD56  FIDUCIALUFIDUCIAL  [FIDUCIAL-MICRO]  162.18,7.49 0 bottom
FD57  FIDUCIALUFIDUCIAL  [FIDUCIAL-MICRO]  163.96,46.86 0 top
FD58  FIDUCIALUFIDUCIAL  [FIDUCIAL-MICRO]  163.96,46.86 0 bottom
FD59  FIDUCIALUFIDUCIAL  [FIDUCIAL-MICRO]  173.36,7.49 0 top
FD60  FIDUCIALUFIDUCIAL  [FIDUCIAL-MICRO]  173.36,7.49 0 bottom
FD61  FIDUCIALUFIDUCIAL  [FIDUCIAL-MICRO]  175.13,46.86 0 top
FD62  FIDUCIALUFIDUCIAL  [FIDUCIAL-MICRO]  175.13,46.86 0 bottom
FD63  FIDUCIALUFIDUCIAL  [FIDUCIAL-MICRO]  184.53,7.49 0 top
FD64  FIDUCIALUFIDUCIAL  [FIDUCIAL-MICRO]  184.53,7.49 0 bottom
FD65  FIDUCIALUFIDUCIAL  [FIDUCIAL-MICRO]  7.49,88.01 0 top
FD66  FIDUCIALUFIDUCIAL  [FIDUCIAL-MICRO]  7.49,88.01 0 bottom
FD67  FIDUCIALUFIDUCIAL  [FIDUCIAL-MICRO]  16.89,48.64 0 top
FD68  FIDUCIALUFIDUCIAL  [FIDUCIAL-MICRO]  16.89,48.64 0 bottom
FD69  FIDUCIALUFIDUCIAL  [FIDUCIAL-MICRO]  18.67,88.01 0 top
FD70  FIDUCIALUFIDUCIAL  [FIDUCIAL-MICRO]  18.67,88.01 0 bottom
FD71  FIDUCIALUFIDUCIAL  [FIDUCIAL-MICRO]  28.07,48.64 0 top
FD72  FIDUCIALUFIDUCIAL  [FIDUCIAL-MICRO]  28.07,48.64 0 bottom
FD73  FIDUCIALUFIDUCIAL  [FIDUCIAL-MICRO]  29.84,88.01 0 top
FD74  FIDUCIALUFIDUCIAL  [FIDUCIAL-MICRO]  29.84,88.01 0 bottom
FD75  FIDUCIALUFIDUCIAL  [FIDUCIAL-MICRO]  39.24,48.64 0 top
FD76  FIDUCIALUFIDUCIAL  [FIDUCIAL-MICRO]  39.24,48.64 0 bottom
FD77  FIDUCIALUFIDUCIAL  [FIDUCIAL-MICRO]  41.02,88.01 0 top
FD78  FIDUCIALUFIDUCIAL  [FIDUCIAL-MICRO]  41.02,88.01 0 bottom
FD79  FIDUCIALUFIDUCIAL  [FIDUCIAL-MICRO]  50.42,48.64 0 top
FD80  FIDUCIALUFIDUCIAL  [FIDUCIAL-MICRO]  50.42,48.64 0 bottom
FD81  FIDUCIALUFIDUCIAL  [FIDUCIAL-MICRO]  52.2,88.01 0 top
FD82  FIDUCIALUFIDUCIAL  [FIDUCIAL-MICRO]  52.2,88.01 0 bottom
FD83  FIDUCIALUFIDUCIAL  [FIDUCIAL-MICRO]  61.59,48.64 0 top
FD84  FIDUCIALUFIDUCIAL  [FIDUCIAL-MICRO]  61.59,48.64 0 bottom
FD85  FIDUCIALUFIDUCIAL  [FIDUCIAL-MICRO]  63.37,88.01 0 top
FD86  FIDUCIALUFIDUCIAL  [FIDUCIAL-MICRO]  63.37,88.01 0 bottom
FD87  FIDUCIALUFIDUCIAL  [FIDUCIAL-MICRO]  72.77,48.64 0 top
FD88  FIDUCIALUFIDUCIAL  [FIDUCIAL-MICRO]  72.77,48.64 0 bottom
FD89  FIDUCIALUFIDUCIAL  [FIDUCIAL-MICRO]  74.55,88.01 0 top
FD90  FIDUCIALUFIDUCIAL  [FIDUCIAL-MICRO]  74.55,88.01 0 bottom
FD91  FIDUCIALUFIDUCIAL  [FIDUCIAL-MICRO]  83.95,48.64 0 top
FD92  FIDUCIALUFIDUCIAL  [FIDUCIAL-MICRO]  83.95,48.64 0 bottom
FD93  FIDUCIALUFIDUCIAL  [FIDUCIAL-MICRO]  85.73,88.01 0 top
FD94  FIDUCIALUFIDUCIAL  [FIDUCIAL-MICRO]  85.73,88.01 0 bottom
FD95  FIDUCIALUFIDUCIAL  [FIDUCIAL-MICRO]  95.12,48.64 0 top
FD96  FIDUCIALUFIDUCIAL  [FIDUCIAL-MICRO]  95.12,48.64 0 bottom
FD97  FIDUCIALUFIDUCIAL  [FIDUCIAL-MICRO]  96.9,88.01 0 top
FD98  FIDUCIALUFIDUCIAL  [FIDUCIAL-MICRO]  96.9,88.01 0 bottom
FD99  FIDUCIALUFIDUCIAL  [FIDUCIAL-MICRO]  106.3,48.64 0 top
FD100  FIDUCIALUFIDUCIAL  [FIDUCIAL-MICRO]  106.3,48.64 0 bottom
FD101  FIDUCIALUFIDUCIAL  [FIDUCIAL-MICRO]  108.08,88.01 0 top
FD102  FIDUCIALUFIDUCIAL  [FIDUCIAL-MICRO]  108.08,88.01 0 bottom
FD103  FIDUCIALUFIDUCIAL  [FIDUCIAL-MICRO]  117.48,48.64 0 top
FD104  FIDUCIALUFIDUCIAL  [FIDUCIAL-MICRO]  117.48,48.64 0 bottom
FD105  FIDUCIALUFIDUCIAL  [FIDUCIAL-MICRO]  119.25,88.01 0 top
FD106  FIDUCIALUFIDUCIAL  [FIDUCIAL-MICRO]  119.25,88.01 0 bottom
FD107  FIDUCIALUFIDUCIAL  [FIDUCIAL-MICRO]  128.65,48.64 0 top
FD108  FIDUCIALUFIDUCIAL  [FIDUCIAL-MICRO]  128.65,48.64 0 bottom
FD109  FIDUCIALUFIDUCIAL  [FIDUCIAL-MICRO]  130.43,88.01 0 top
FD110  FIDUCIALUFIDUCIAL  [FIDUCIAL-MICRO]  130.43,88.01 0 bottom
FD111  FIDUCIALUFIDUCIAL  [FIDUCIAL-MICRO]  139.83,48.64 0 top
FD112  FIDUCIALUFIDUCIAL  [FIDUCIAL-MICRO]  139.83,48.64 0 bottom
FD113  FIDUCIALUFIDUCIAL  [FIDUCIAL-MICRO]  141.61,88.01 0 top
FD114  FIDUCIALUFIDUCIAL  [FIDUCIAL-MICRO]  141.61,88.01 0 bottom
FD115  FIDUCIALUFIDUCIAL  [FIDUCIAL-MICRO]  151,48.64 0 top
FD116  FIDUCIALUFIDUCIAL  [FIDUCIAL-MICRO]  151,48.64 0 bottom
FD117  FIDUCIALUFIDUCIAL  [FIDUCIAL-MICRO]  152.78,88.01 0 top
FD118  FIDUCIALUFIDUCIAL  [FIDUCIAL-MICRO]  152.78,88.01 0 bottom
FD119  FIDUCIALUFIDUCIAL  [FIDUCIAL-MICRO]  162.18,48.64 0 top
FD120  FIDUCIALUFIDUCIAL  [FIDUCIAL-MICRO]  162.18,48.64 0 bottom
FD121  FIDUCIALUFIDUCIAL  [FIDUCIAL-MICRO]  163.96,88.01 0 top
FD122  FIDUCIALUFIDUCIAL  [FIDUCIAL-MICRO]  163.96,88.01 0 bottom
FD123  FIDUCIALUFIDUCIAL  [FIDUCIAL-MICRO]  173.36,48.64 0 top
FD124  FIDUCIALUFIDUCIAL  [FIDUCIAL-MICRO]  173.36,48.64 0 bottom
FD125  FIDUCIALUFIDUCIAL  [FIDUCIAL-MICRO]  175.13,88.01 0 top
FD126  FIDUCIALUFIDUCIAL  [FIDUCIAL-MICRO]  175.13,88.01 0 bottom
FD127  FIDUCIALUFIDUCIAL  [FIDUCIAL-MICRO]  184.53,48.64 0 top
FD128  FIDUCIALUFIDUCIAL  [FIDUCIAL-MICRO]  184.53,48.64 0 bottom
FD129  FIDUCIALUFIDUCIAL  [FIDUCIAL-MICRO]  7.49,129.16 0 top
FD130  FIDUCIALUFIDUCIAL  [FIDUCIAL-MICRO]  7.49,129.16 0 bottom
FD131  FIDUCIALUFIDUCIAL  [FIDUCIAL-MICRO]  16.89,89.79 0 top
FD132  FIDUCIALUFIDUCIAL  [FIDUCIAL-MICRO]  16.89,89.79 0 bottom
FD133  FIDUCIALUFIDUCIAL  [FIDUCIAL-MICRO]  18.67,129.16 0 top
FD134  FIDUCIALUFIDUCIAL  [FIDUCIAL-MICRO]  18.67,129.16 0 bottom
FD135  FIDUCIALUFIDUCIAL  [FIDUCIAL-MICRO]  28.07,89.79 0 top
FD136  FIDUCIALUFIDUCIAL  [FIDUCIAL-MICRO]  28.07,89.79 0 bottom
FD137  FIDUCIALUFIDUCIAL  [FIDUCIAL-MICRO]  29.84,129.16 0 top
FD138  FIDUCIALUFIDUCIAL  [FIDUCIAL-MICRO]  29.84,129.16 0 bottom
FD139  FIDUCIALUFIDUCIAL  [FIDUCIAL-MICRO]  39.24,89.79 0 top
FD140  FIDUCIALUFIDUCIAL  [FIDUCIAL-MICRO]  39.24,89.79 0 bottom
FD141  FIDUCIALUFIDUCIAL  [FIDUCIAL-MICRO]  41.02,129.16 0 top
FD142  FIDUCIALUFIDUCIAL  [FIDUCIAL-MICRO]  41.02,129.16 0 bottom
FD143  FIDUCIALUFIDUCIAL  [FIDUCIAL-MICRO]  50.42,89.79 0 top
FD144  FIDUCIALUFIDUCIAL  [FIDUCIAL-MICRO]  50.42,89.79 0 bottom
FD145  FIDUCIALUFIDUCIAL  [FIDUCIAL-MICRO]  52.2,129.16 0 top
FD146  FIDUCIALUFIDUCIAL  [FIDUCIAL-MICRO]  52.2,129.16 0 bottom
FD147  FIDUCIALUFIDUCIAL  [FIDUCIAL-MICRO]  61.59,89.79 0 top
FD148  FIDUCIALUFIDUCIAL  [FIDUCIAL-MICRO]  61.59,89.79 0 bottom
FD149  FIDUCIALUFIDUCIAL  [FIDUCIAL-MICRO]  63.37,129.16 0 top
FD150  FIDUCIALUFIDUCIAL  [FIDUCIAL-MICRO]  63.37,129.16 0 bottom
FD151  FIDUCIALUFIDUCIAL  [FIDUCIAL-MICRO]  72.77,89.79 0 top
FD152  FIDUCIALUFIDUCIAL  [FIDUCIAL-MICRO]  72.77,89.79 0 bottom
FD153  FIDUCIALUFIDUCIAL  [FIDUCIAL-MICRO]  74.55,129.16 0 top
FD154  FIDUCIALUFIDUCIAL  [FIDUCIAL-MICRO]  74.55,129.16 0 bottom
FD155  FIDUCIALUFIDUCIAL  [FIDUCIAL-MICRO]  83.95,89.79 0 top
FD156  FIDUCIALUFIDUCIAL  [FIDUCIAL-MICRO]  83.95,89.79 0 bottom
FD157  FIDUCIALUFIDUCIAL  [FIDUCIAL-MICRO]  85.73,129.16 0 top
FD158  FIDUCIALUFIDUCIAL  [FIDUCIAL-MICRO]  85.73,129.16 0 bottom
FD159  FIDUCIALUFIDUCIAL  [FIDUCIAL-MICRO]  95.12,89.79 0 top
FD160  FIDUCIALUFIDUCIAL  [FIDUCIAL-MICRO]  95.12,89.79 0 bottom
FD161  FIDUCIALUFIDUCIAL  [FIDUCIAL-MICRO]  96.9,129.16 0 top
FD162  FIDUCIALUFIDUCIAL  [FIDUCIAL-MICRO]  96.9,129.16 0 bottom
FD163  FIDUCIALUFIDUCIAL  [FIDUCIAL-MICRO]  106.3,89.79 0 top
FD164  FIDUCIALUFIDUCIAL  [FIDUCIAL-MICRO]  106.3,89.79 0 bottom
FD165  FIDUCIALUFIDUCIAL  [FIDUCIAL-MICRO]  108.08,129.16 0 top
FD166  FIDUCIALUFIDUCIAL  [FIDUCIAL-MICRO]  108.08,129.16 0 bottom
FD167  FIDUCIALUFIDUCIAL  [FIDUCIAL-MICRO]  117.48,89.79 0 top
FD168  FIDUCIALUFIDUCIAL  [FIDUCIAL-MICRO]  117.48,89.79 0 bottom
FD169  FIDUCIALUFIDUCIAL  [FIDUCIAL-MICRO]  119.25,129.16 0 top
FD170  FIDUCIALUFIDUCIAL  [FIDUCIAL-MICRO]  119.25,129.16 0 bottom
FD171  FIDUCIALUFIDUCIAL  [FIDUCIAL-MICRO]  128.65,89.79 0 top
FD172  FIDUCIALUFIDUCIAL  [FIDUCIAL-MICRO]  128.65,89.79 0 bottom
FD173  FIDUCIALUFIDUCIAL  [FIDUCIAL-MICRO]  130.43,129.16 0 top
FD174  FIDUCIALUFIDUCIAL  [FIDUCIAL-MICRO]  130.43,129.16 0 bottom
FD175  FIDUCIALUFIDUCIAL  [FIDUCIAL-MICRO]  139.83,89.79 0 top
FD176  FIDUCIALUFIDUCIAL  [FIDUCIAL-MICRO]  139.83,89.79 0 bottom
FD177  FIDUCIALUFIDUCIAL  [FIDUCIAL-MICRO]  141.61,129.16 0 top
FD178  FIDUCIALUFIDUCIAL  [FIDUCIAL-MICRO]  141.61,129.16 0 bottom
FD179  FIDUCIALUFIDUCIAL  [FIDUCIAL-MICRO]  151,89.79 0 top
FD180  FIDUCIALUFIDUCIAL  [FIDUCIAL-MICRO]  151,89.79 0 bottom
FD181  FIDUCIALUFIDUCIAL  [FIDUCIAL-MICRO]  152.78,129.16 0 top
FD182  FIDUCIALUFIDUCIAL  [FIDUCIAL-MICRO]  152.78,129.16 0 bottom
FD183  FIDUCIALUFIDUCIAL  [FIDUCIAL-MICRO]  162.18,89.79 0 top
FD184  FIDUCIALUFIDUCIAL  [FIDUCIAL-MICRO]  162.18,89.79 0 bottom
FD185  FIDUCIALUFIDUCIAL  [FIDUCIAL-MICRO]  163.96,129.16 0 top
FD186  FIDUCIALUFIDUCIAL  [FIDUCIAL-MICRO]  163.96,129.16 0 bottom
FD187  FIDUCIALUFIDUCIAL  [FIDUCIAL-MICRO]  173.36,89.79 0 top
FD188  FIDUCIALUFIDUCIAL  [FIDUCIAL-MICRO]  173.36,89.79 0 bottom
FD189  FIDUCIALUFIDUCIAL  [FIDUCIAL-MICRO]  175.13,129.16 0 top
FD190  FIDUCIALUFIDUCIAL  [FIDUCIAL-MICRO]  175.13,129.16 0 bottom
FD191  FIDUCIALUFIDUCIAL  [FIDUCIAL-MICRO]  184.53,89.79 0 top
FD192  FIDUCIALUFIDUCIAL  [FIDUCIAL-MICRO]  184.53,89.79 0 bottom
I2C  JUMPER-SMT_3_2-NC_TRACE_SILK  [SMT-JUMPER_3_2-NC_TRACE_SILK]  12.19,39.88 180 top
I2C1  JUMPER-SMT_3_2-NC_TRACE_SILK  [SMT-JUMPER_3_2-NC_TRACE_SILK]  23.37,39.88 180 top
I2C2  JUMPER-SMT_3_2-NC_TRACE_SILK  [SMT-JUMPER_3_2-NC_TRACE_SILK]  34.54,39.88 180 top
I2C3  JUMPER-SMT_3_2-NC_TRACE_SILK  [SMT-JUMPER_3_2-NC_TRACE_SILK]  45.72,39.88 180 top
I2C4  JUMPER-SMT_3_2-NC_TRACE_SILK  [SMT-JUMPER_3_2-NC_TRACE_SILK]  56.9,39.88 180 top
I2C5  JUMPER-SMT_3_2-NC_TRACE_SILK  [SMT-JUMPER_3_2-NC_TRACE_SILK]  68.07,39.88 180 top
I2C6  JUMPER-SMT_3_2-NC_TRACE_SILK  [SMT-JUMPER_3_2-NC_TRACE_SILK]  79.25,39.88 180 top
I2C7  JUMPER-SMT_3_2-NC_TRACE_SILK  [SMT-JUMPER_3_2-NC_TRACE_SILK]  90.42,39.88 180 top
I2C8  JUMPER-SMT_3_2-NC_TRACE_SILK  [SMT-JUMPER_3_2-NC_TRACE_SILK]  101.6,39.88 180 top
I2C9  JUMPER-SMT_3_2-NC_TRACE_SILK  [SMT-JUMPER_3_2-NC_TRACE_SILK]  112.78,39.88 180 top
I2C10  JUMPER-SMT_3_2-NC_TRACE_SILK  [SMT-JUMPER_3_2-NC_TRACE_SILK]  123.95,39.88 180 top
I2C11  JUMPER-SMT_3_2-NC_TRACE_SILK  [SMT-JUMPER_3_2-NC_TRACE_SILK]  135.13,39.88 180 top
I2C12  JUMPER-SMT_3_2-NC_TRACE_SILK  [SMT-JUMPER_3_2-NC_TRACE_SILK]  146.3,39.88 180 top
I2C13  JUMPER-SMT_3_2-NC_TRACE_SILK  [SMT-JUMPER_3_2-NC_TRACE_SILK]  157.48,39.88 180 top
I2C14  JUMPER-SMT_3_2-NC_TRACE_SILK  [SMT-JUMPER_3_2-NC_TRACE_SILK]  168.66,39.88 180 top
I2C15  JUMPER-SMT_3_2-NC_TRACE_SILK  [SMT-JUMPER_3_2-NC_TRACE_SILK]  179.83,39.88 180 top
I2C16  JUMPER-SMT_3_2-NC_TRACE_SILK  [SMT-JUMPER_3_2-NC_TRACE_SILK]  12.19,81.03 180 top
I2C17  JUMPER-SMT_3_2-NC_TRACE_SILK  [SMT-JUMPER_3_2-NC_TRACE_SILK]  23.37,81.03 180 top
I2C18  JUMPER-SMT_3_2-NC_TRACE_SILK  [SMT-JUMPER_3_2-NC_TRACE_SILK]  34.54,81.03 180 top
I2C19  JUMPER-SMT_3_2-NC_TRACE_SILK  [SMT-JUMPER_3_2-NC_TRACE_SILK]  45.72,81.03 180 top
I2C20  JUMPER-SMT_3_2-NC_TRACE_SILK  [SMT-JUMPER_3_2-NC_TRACE_SILK]  56.9,81.03 180 top
I2C21  JUMPER-SMT_3_2-NC_TRACE_SILK  [SMT-JUMPER_3_2-NC_TRACE_SILK]  68.07,81.03 180 top
I2C22  JUMPER-SMT_3_2-NC_TRACE_SILK  [SMT-JUMPER_3_2-NC_TRACE_SILK]  79.25,81.03 180 top
I2C23  JUMPER-SMT_3_2-NC_TRACE_SILK  [SMT-JUMPER_3_2-NC_TRACE_SILK]  90.42,81.03 180 top
I2C24  JUMPER-SMT_3_2-NC_TRACE_SILK  [SMT-JUMPER_3_2-NC_TRACE_SILK]  101.6,81.03 180 top
I2C25  JUMPER-SMT_3_2-NC_TRACE_SILK  [SMT-JUMPER_3_2-NC_TRACE_SILK]  112.78,81.03 180 top
I2C26  JUMPER-SMT_3_2-NC_TRACE_SILK  [SMT-JUMPER_3_2-NC_TRACE_SILK]  123.95,81.03 180 top
I2C27  JUMPER-SMT_3_2-NC_TRACE_SILK  [SMT-JUMPER_3_2-NC_TRACE_SILK]  135.13,81.03 180 top
I2C28  JUMPER-SMT_3_2-NC_TRACE_SILK  [SMT-JUMPER_3_2-NC_TRACE_SILK]  146.3,81.03 180 top
I2C29  JUMPER-SMT_3_2-NC_TRACE_SILK  [SMT-JUMPER_3_2-NC_TRACE_SILK]  157.48,81.03 180 top
I2C30  JUMPER-SMT_3_2-NC_TRACE_SILK  [SMT-JUMPER_3_2-NC_TRACE_SILK]  168.66,81.03 180 top
I2C31  JUMPER-SMT_3_2-NC_TRACE_SILK  [SMT-JUMPER_3_2-NC_TRACE_SILK]  179.83,81.03 180 top
I2C32  JUMPER-SMT_3_2-NC_TRACE_SILK  [SMT-JUMPER_3_2-NC_TRACE_SILK]  12.19,122.17 180 top
I2C33  JUMPER-SMT_3_2-NC_TRACE_SILK  [SMT-JUMPER_3_2-NC_TRACE_SILK]  23.37,122.17 180 top
I2C34  JUMPER-SMT_3_2-NC_TRACE_SILK  [SMT-JUMPER_3_2-NC_TRACE_SILK]  34.54,122.17 180 top
I2C35  JUMPER-SMT_3_2-NC_TRACE_SILK  [SMT-JUMPER_3_2-NC_TRACE_SILK]  45.72,122.17 180 top
I2C36  JUMPER-SMT_3_2-NC_TRACE_SILK  [SMT-JUMPER_3_2-NC_TRACE_SILK]  56.9,122.17 180 top
I2C37  JUMPER-SMT_3_2-NC_TRACE_SILK  [SMT-JUMPER_3_2-NC_TRACE_SILK]  68.07,122.17 180 top
I2C38  JUMPER-SMT_3_2-NC_TRACE_SILK  [SMT-JUMPER_3_2-NC_TRACE_SILK]  79.25,122.17 180 top
I2C39  JUMPER-SMT_3_2-NC_TRACE_SILK  [SMT-JUMPER_3_2-NC_TRACE_SILK]  90.42,122.17 180 top
I2C40  JUMPER-SMT_3_2-NC_TRACE_SILK  [SMT-JUMPER_3_2-NC_TRACE_SILK]  101.6,122.17 180 top
I2C41  JUMPER-SMT_3_2-NC_TRACE_SILK  [SMT-JUMPER_3_2-NC_TRACE_SILK]  112.78,122.17 180 top
I2C42  JUMPER-SMT_3_2-NC_TRACE_SILK  [SMT-JUMPER_3_2-NC_TRACE_SILK]  123.95,122.17 180 top
I2C43  JUMPER-SMT_3_2-NC_TRACE_SILK  [SMT-JUMPER_3_2-NC_TRACE_SILK]  135.13,122.17 180 top
I2C44  JUMPER-SMT_3_2-NC_TRACE_SILK  [SMT-JUMPER_3_2-NC_TRACE_SILK]  146.3,122.17 180 top
I2C45  JUMPER-SMT_3_2-NC_TRACE_SILK  [SMT-JUMPER_3_2-NC_TRACE_SILK]  157.48,122.17 180 top
I2C46  JUMPER-SMT_3_2-NC_TRACE_SILK  [SMT-JUMPER_3_2-NC_TRACE_SILK]  168.66,122.17 180 top
I2C47  JUMPER-SMT_3_2-NC_TRACE_SILK  [SMT-JUMPER_3_2-NC_TRACE_SILK]  179.83,122.17 180 top
J1  QWIIC_RIGHT_ANGLE  [JST04_1MM_RA]  12.19,42.42 180 top
J2  QWIIC_RIGHT_ANGLE  [JST04_1MM_RA]  23.37,42.42 180 top
J3  QWIIC_RIGHT_ANGLE  [JST04_1MM_RA]  34.54,42.42 180 top
J4  QWIIC_RIGHT_ANGLE  [JST04_1MM_RA]  45.72,42.42 180 top
J5  QWIIC_RIGHT_ANGLE  [JST04_1MM_RA]  56.9,42.42 180 top
J6  QWIIC_RIGHT_ANGLE  [JST04_1MM_RA]  68.07,42.42 180 top
J7  QWIIC_RIGHT_ANGLE  [JST04_1MM_RA]  79.25,42.42 180 top
J8  QWIIC_RIGHT_ANGLE  [JST04_1MM_RA]  90.42,42.42 180 top
J9  QWIIC_RIGHT_ANGLE  [JST04_1MM_RA]  101.6,42.42 180 top
J10  QWIIC_RIGHT_ANGLE  [JST04_1MM_RA]  112.78,42.42 180 top
J11  QWIIC_RIGHT_ANGLE  [JST04_1MM_RA]  123.95,42.42 180 top
J12  QWIIC_RIGHT_ANGLE  [JST04_1MM_RA]  135.13,42.42 180 top
J13  QWIIC_RIGHT_ANGLE  [JST04_1MM_RA]  146.3,42.42 180 top
J14  QWIIC_RIGHT_ANGLE  [JST04_1MM_RA]  157.48,42.42 180 top